# EAGLE board controller_io (EAGLE 6.5.0), part 1 of 5
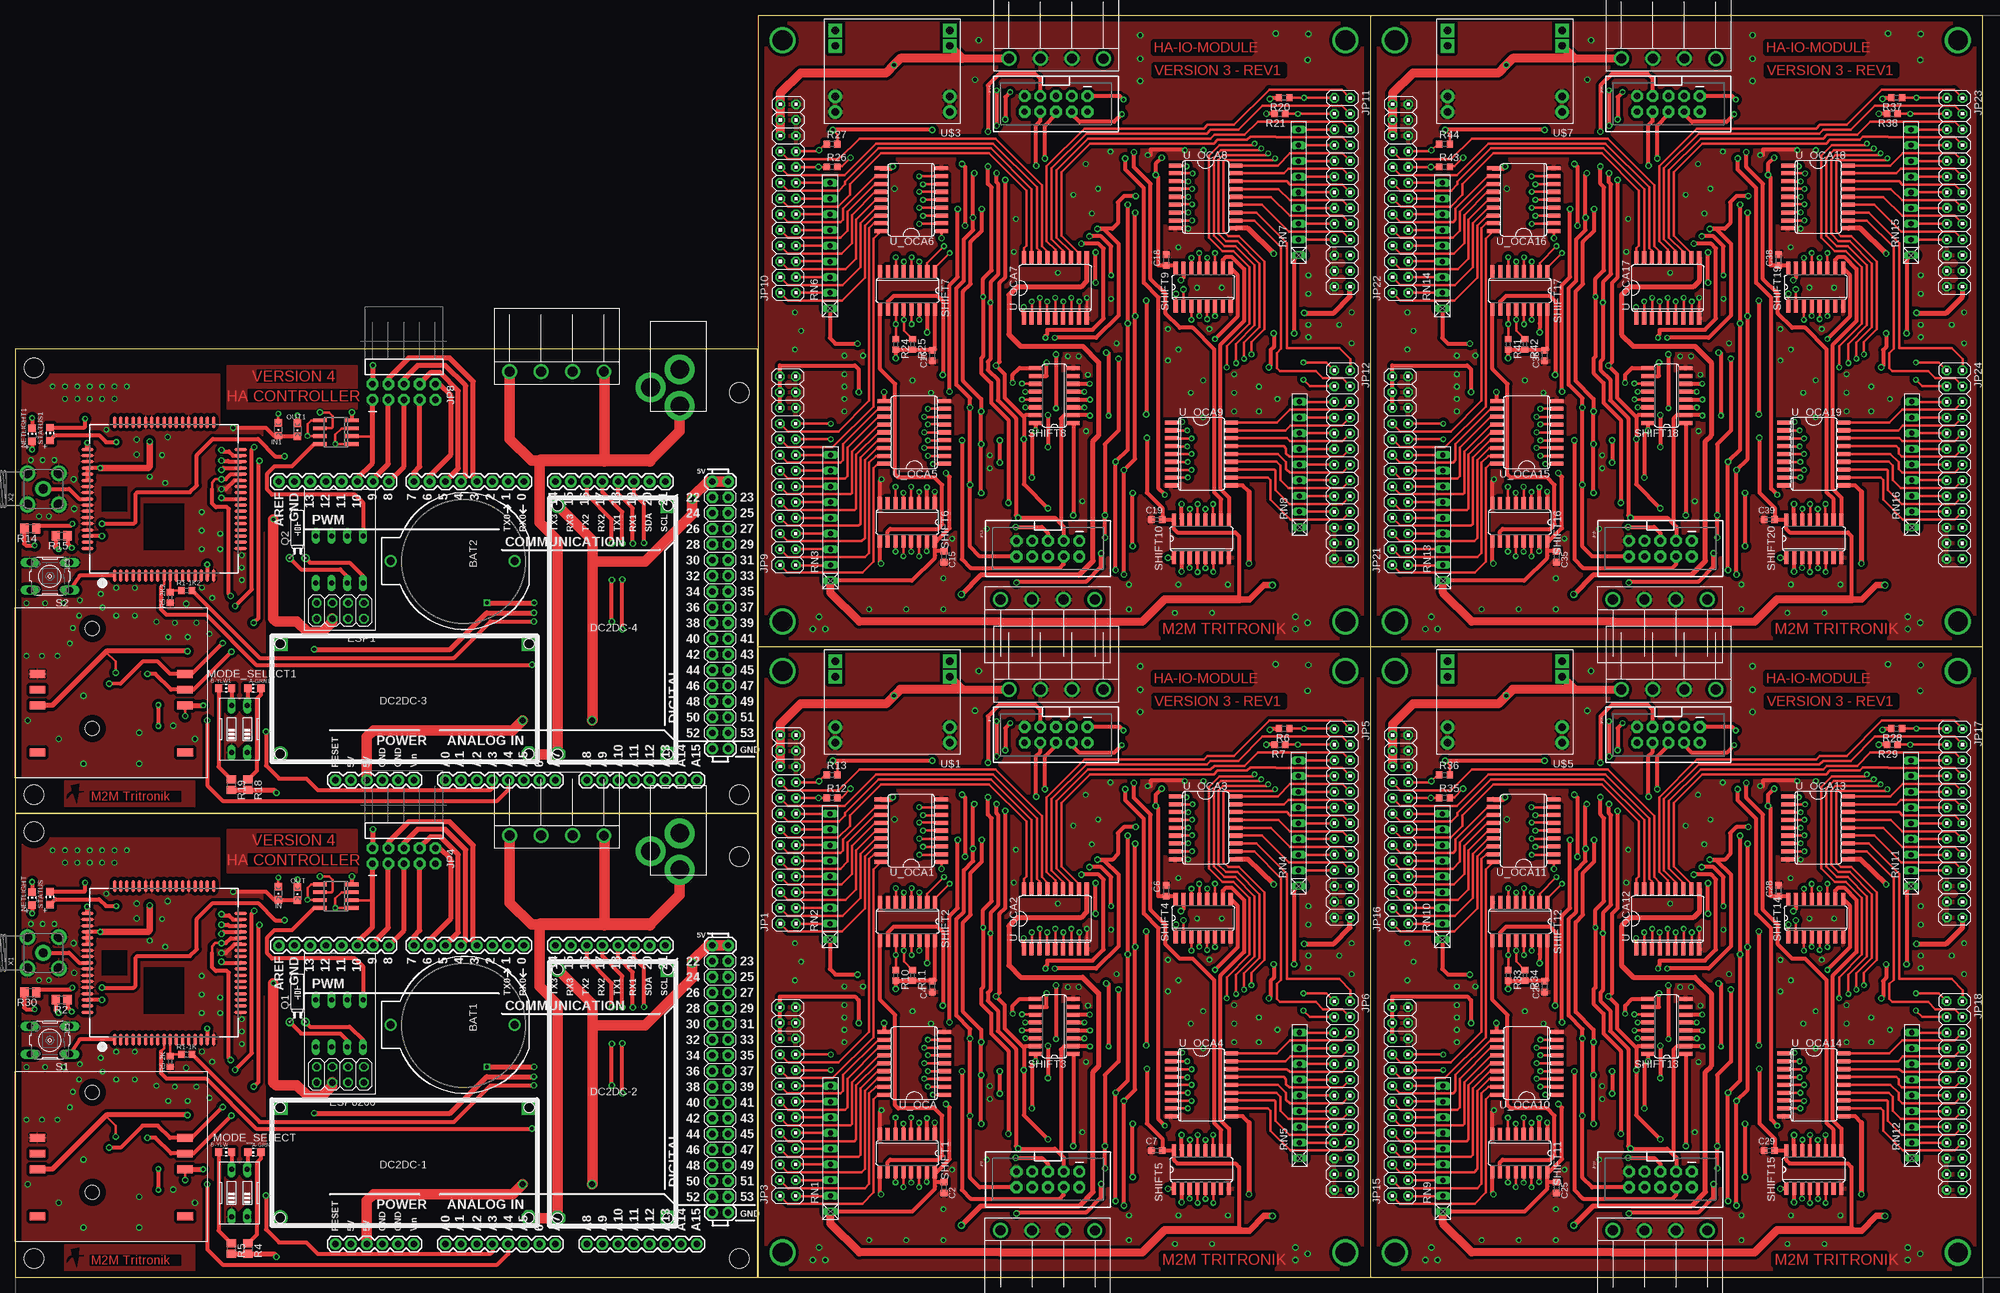
[diagram p0: board, top side]
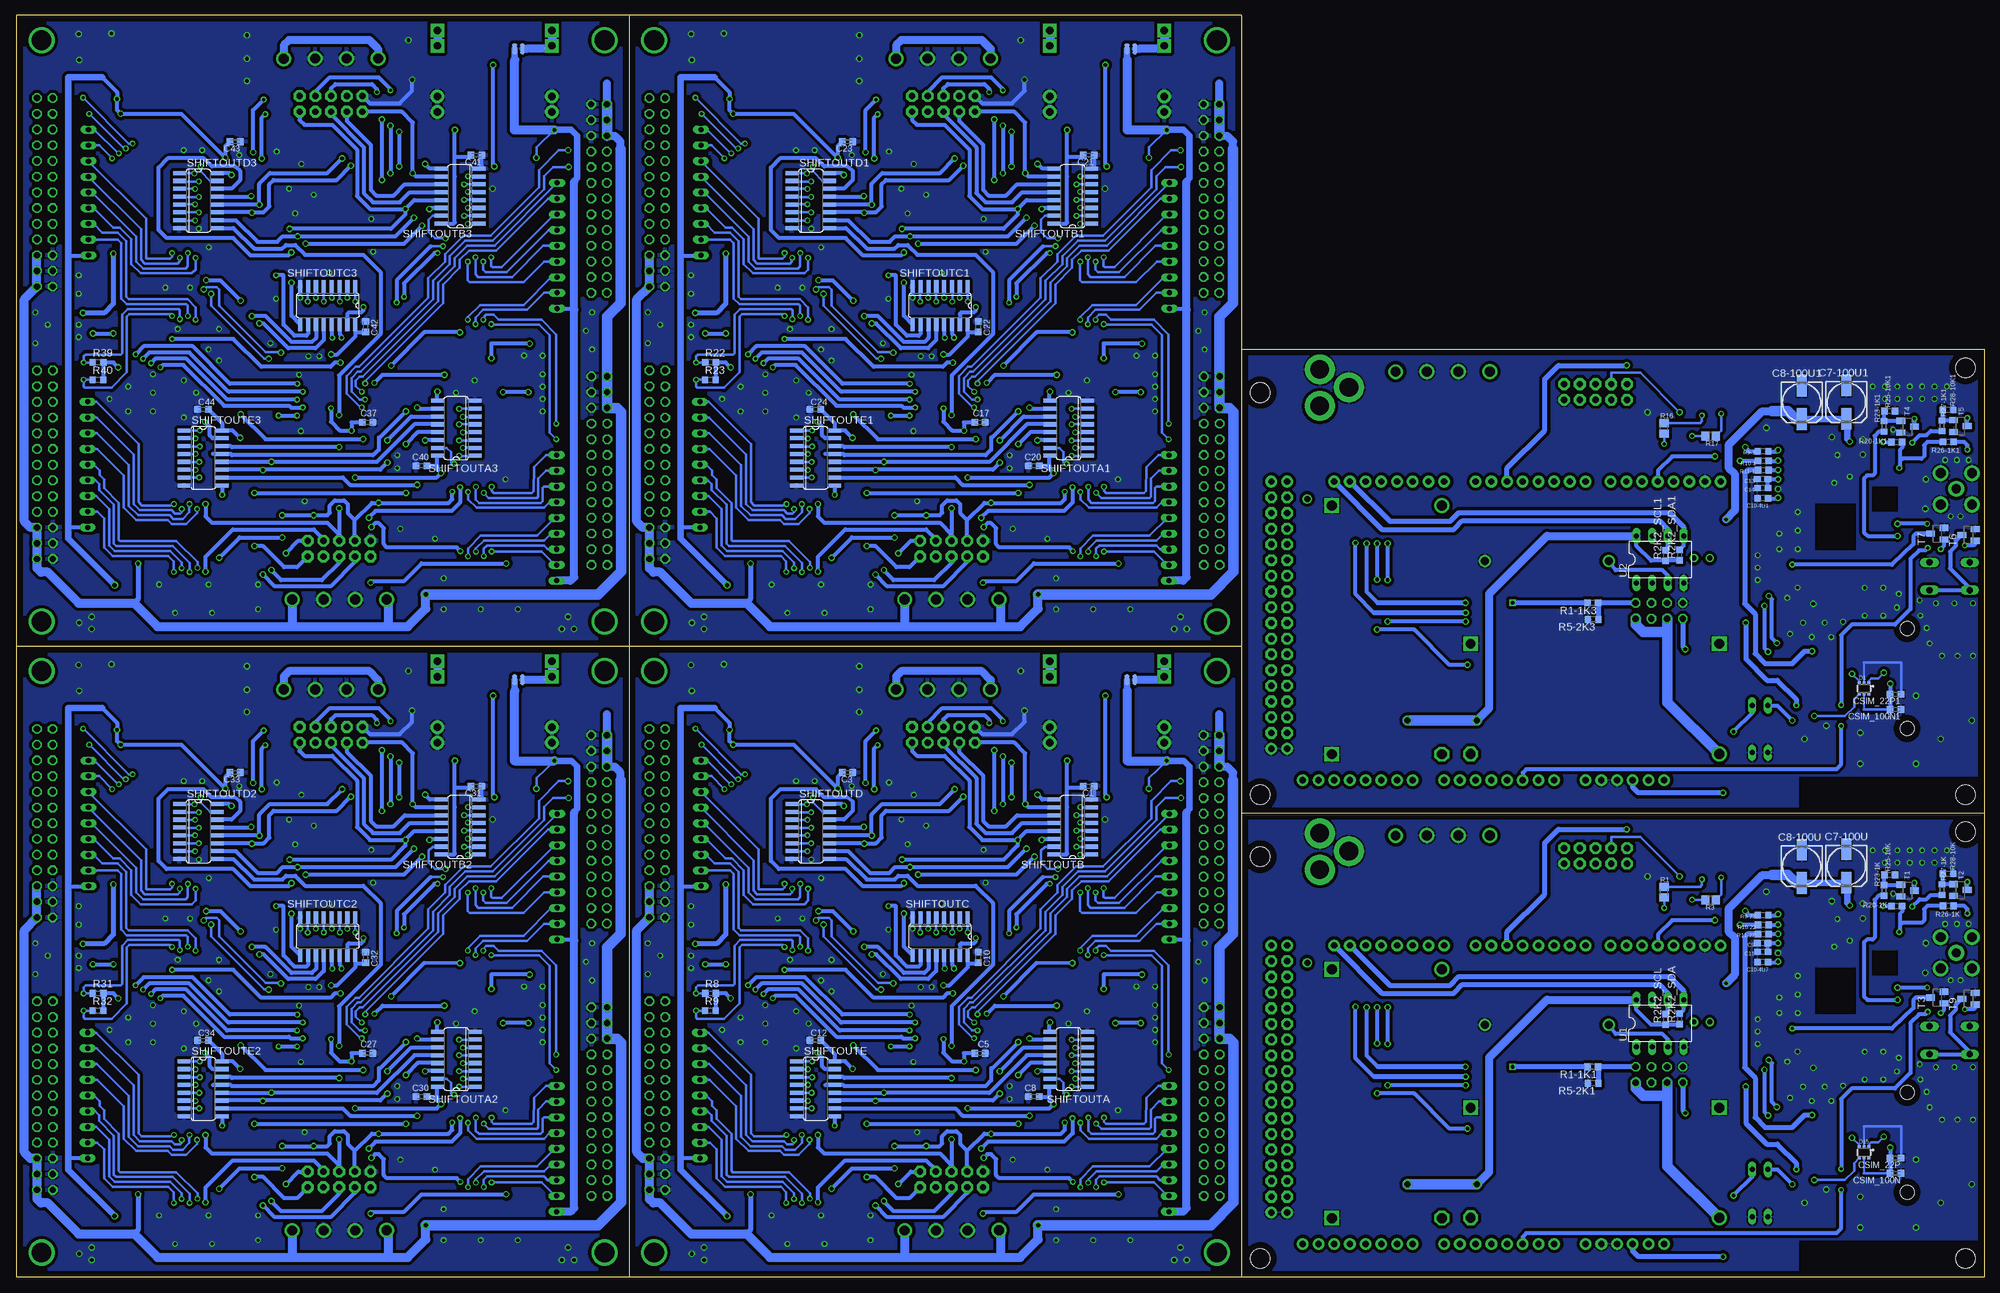
[diagram p1: board, bottom side, seen from below]

Size 318.01 x 204 mm. Coordinates in mm from the lower left corner, seen from the top.
Outline: 0,75.02 119.98,75.03 120,0.02 0,0.02 0,75.02
Outline: 219.01,0 120.01,0 120.01,102
Outline: 0,75.02 120,75.02 119.98,150.03 0,150.02 0,75.02
Outline: 219.01,204 120.01,204 120.01,102
Outline: 120.01,102 219.01,102
Outline: 318.01,102 318.01,0 219.01,0
Outline: 219.01,102 219.01,0
Outline: 318.01,102 318.01,204 219.01,204
Outline: 219.01,102 318.01,102
Outline: 219.01,204 219.01,102
Copper layers (1*16): Top 0.035mm / dielectric 1.5mm / Bottom 0.035mm
Design rules "default": minimum track width 10mil, minimum drill 24mil, track to track 8mil, track to pad 8mil, pad to pad 8mil, via to via 8mil, smd to smd 8mil, copper to edge 40mil, drill to drill 8mil, minimum pad ring 10mil, minimum via ring 8mil, stop-mask expansion 4mil, vias tented up to drill 0mil, thermal gap 10mil
Net classes: 1 power: width 0.305 mm, drill 0.6 mm, clearance 0.813 mm; 2 GND: width 0.305 mm, drill 0.6 mm, clearance 0.508 mm; 3 LIVEAC: width 0.508 mm, drill 0.508 mm, clearance 1.27 mm
Holes 3.2 mm at 3,3.02 3,72.02 117,68.02 117,3.02 3,78.02 3,147.02 117,143.02 117,78.02

## Footprints (pad centres in the part's own frame; a part is rotated, then mirrored left to right if it is on the bottom)
4-PIN-CON-1759017 = drill 1.6: 1 -7.62,4.13; 2 -2.55,4.1; 3 2.55,4.1; 4 7.63,4.1
CHIP-LED0805 = smd 1.2 x 1.2: A 0,-1.05; C 0,1.05
ARDUINO_MEGA = drill 1.016 pad 1.88: 0 8.89,24.13; 1 6.35,24.13; 2 3.81,24.13; 3 1.27,24.13; 3.3V -19.05,-24.13; 4 -1.27,24.13; 5 -3.81,24.13; 5V@0 -16.51,-24.13; 5V@1 39.37,24.13; 5V@2 41.91,24.13; 6 -6.35,24.13; 7 -8.89,24.13; 8 -12.954,24.13; 9 -15.494,24.13; 10 -18.034,24.13; 11 -20.574,24.13; 12 -23.114,24.13; 13 -25.654,24.13; 14 13.97,24.13; 15 16.51,24.13; 16 19.05,24.13; 17 21.59,24.13; 18 24.13,24.13; 19 26.67,24.13; 20 29.21,24.13; 21 31.75,24.13; A0 -3.81,-24.13; A1 -1.27,-24.13; A2 1.27,-24.13; A3 3.81,-24.13; A4 6.35,-24.13; A5 8.89,-24.13; A6 11.43,-24.13; A7 13.97,-24.13; A8 19.05,-24.13; A9 21.59,-24.13; A10 24.13,-24.13; A11 26.67,-24.13; A12 29.21,-24.13; A13 31.75,-24.13; A14 34.29,-24.13; A15 36.83,-24.13; AREF -30.734,24.13; GND@0 -13.97,-24.13; GND@1 -11.43,-24.13; GND@2 39.37,-19.05; GND@3 41.91,-19.05; GND@4 -28.194,24.13; RESET -21.59,-24.13; VIN -8.89,-24.13 | drill 1.016 pad 1.88 octagon: 22 39.37,21.59; 23 41.91,21.59; 24 39.37,19.05; 25 41.91,19.05; 26 39.37,16.51; 27 41.91,16.51; 28 39.37,13.97; 29 41.91,13.97; 30 39.37,11.43; 31 41.91,11.43; 32 39.37,8.89; 33 41.91,8.89; 34 39.37,6.35; 35 41.91,6.35; 36 39.37,3.81; 37 41.91,3.81; 38 39.37,1.27; 39 41.91,1.27; 40 39.37,-1.27; 41 41.91,-1.27; 42 39.37,-3.81; 43 41.91,-3.81; 44 39.37,-6.35; 45 41.91,-6.35; 46 39.37,-8.89; 47 41.91,-8.89; 48 39.37,-11.43; 49 41.91,-11.43; 50 39.37,-13.97; 51 41.91,-13.97; 52 39.37,-16.51; 53 41.91,-16.51
BATTCOM_20MM_PTH = drill 1.3: 1 11.85,0; 2 -8.15,0
C0603K = smd 1.05 x 1.08: 1 -0.875,0; 2 0.875,0
153CLV-0605 = smd 3.5 x 1.6: + 2.7,0; - -2.7,0
C0603 = smd 1.1 x 1: 1 -0.85,0; 2 0.85,0
SOT363 = smd 0.5 x 0.5: 1 -0.75,-0.9; 3 0.75,-0.9; 4 0.75,0.9; 6 -0.75,0.9 | smd 0.4 x 0.5: 2 0,-0.9; 5 0,0.9
DCDCMODULE = drill 1.6 square: GND#0 -20.08,-8.82; GND#1 20.12,-8.82 | drill 1.6 octagon: VIN -20.08,8.98 | drill 1.6: VOUT 20.12,8.98
PJ-102A = drill 3 pad 4.8: RING 0.1,-3.39; RING_SW -4.6,-6.29; TIP 0.1,-9.29
ESP8266 = drill 1.016 octagon: CHPD 1.27,1.27; GND 3.81,-1.27; IO0 -1.27,-1.27; IO2 1.27,-1.27; RST -1.27,1.27; RXD -3.81,-1.27; TXD 3.81,1.27; VCC -3.81,1.27
SIM900_SMT = smd 2 x 0.6: P$1 -12.4,8; P$2 -12.4,7; P$3 -12.4,6; P$4 -12.4,5; P$5 -12.4,4; P$6 -12.4,3; P$7 -12.4,2; P$8 -12.4,1; P$9 -12.4,0; P$10 -12.4,-1; P$11 -12.4,-2; P$12 -12.4,-3; P$13 -12.4,-4; P$14 -12.4,-5; P$15 -12.4,-6; P$16 -12.4,-7; P$17 -12.4,-8; P$35 12.4,-8; P$36 12.4,-7; P$37 12.4,-6; P$38 12.4,-5; P$39 12.4,-4; P$40 12.4,-3; P$41 12.4,-2; P$42 12.4,-1; P$43 12.4,0; P$44 12.4,1; P$45 12.4,2; P$46 12.4,3; P$47 12.4,4; P$48 12.4,5; P$49 12.4,6; P$50 12.4,7; P$51 12.4,8 | smd 0.6 x 2: P$18 -8,-12.4; P$19 -7,-12.4; P$20 -6,-12.4; P$21 -5,-12.4; P$22 -4,-12.4; P$23 -3,-12.4; P$24 -2,-12.4; P$25 -1,-12.4; P$26 0,-12.4; P$27 1,-12.4; P$28 2,-12.4; P$29 3,-12.4; P$30 4,-12.4; P$31 5,-12.4; P$32 6,-12.4; P$33 7,-12.4; P$34 8,-12.4; P$52 8,12.4; P$53 7,12.4; P$54 6,12.4; P$55 5,12.4; P$56 4,12.4; P$57 3,12.4; P$58 2,12.4; P$59 1,12.4; P$60 0,12.4; P$61 -1,12.4; P$62 -2,12.4; P$63 -3,12.4; P$64 -4,12.4; P$65 -5,12.4; P$66 -6,12.4; P$67 -7,12.4; P$68 -8,12.4
SO08 = smd 0.6 x 2.2: 1 -1.905,-2.6; 2 -0.635,-2.6; 3 0.635,-2.6; 4 1.905,-2.6; 5 1.905,2.6; 6 0.635,2.6; 7 -0.635,2.6; 8 -1.905,2.6
CHIPLED_0805 = smd 1.2 x 1.2: A 0,-1.05; C 0,1.05
2X13 = drill 1.016 octagon: 1 -15.24,-1.27; 2 -15.24,1.27; 3 -12.7,-1.27; 4 -12.7,1.27; 5 -10.16,-1.27; 6 -10.16,1.27; 7 -7.62,-1.27; 8 -7.62,1.27; 9 -5.08,-1.27; 10 -5.08,1.27; 11 -2.54,-1.27; 12 -2.54,1.27; 13 0,-1.27; 14 0,1.27; 15 2.54,-1.27; 16 2.54,1.27; 17 5.08,-1.27; 18 5.08,1.27; 19 7.62,-1.27; 20 7.62,1.27; 21 10.16,-1.27; 22 10.16,1.27; 23 12.7,-1.27; 24 12.7,1.27; 25 15.24,-1.27; 26 15.24,1.27
2X5-SHROUDED = drill 1.016 pad 1.88 octagon: 1 -1.27,5.08; 2 1.27,5.08; 3 -1.27,2.54; 4 1.27,2.54; 5 -1.27,0; 6 1.27,0; 7 -1.27,-2.54; 8 1.27,-2.54; 9 -1.27,-5.08; 10 1.27,-5.08
2X5-RA = drill 1.016 pad 1.88 octagon: 1 -1.27,5.08; 2 1.27,5.08; 3 -1.27,2.54; 4 1.27,2.54; 5 -1.27,0; 6 1.27,0; 7 -1.27,-2.54; 8 1.27,-2.54; 9 -1.27,-5.08; 10 1.27,-5.08
EDG-02 = drill 0.813 long: 1 -1.27,-3.81; 2 1.27,-3.81; 3 1.27,3.81; 4 -1.27,3.81
TC26H = drill 0.813: 1 -1.27,0; 2 1.27,0
R0805 = smd 1.3 x 1.5: 1 -0.85,0; 2 0.85,0
R0603 = smd 1 x 1.1: 1 -0.85,0; 2 0.85,0
M0805 = smd 1.3 x 1.6: 1 -0.95,0; 2 0.95,0
RN-9 = drill 0.813 long: 1 -10.16,0; 2 -7.62,0; 3 -5.08,0; 4 -2.54,0; 5 0,0; 6 2.54,0; 7 5.08,0; 8 7.62,0; 9 10.16,0
B3F-10XX = drill 1.016 long: 1 -3.251,2.261; 2 3.251,2.261; 3 -3.251,-2.261; 4 3.251,-2.261
SO16 = smd 0.66 x 2.032: 1 -4.445,-3.073; 2 -3.175,-3.073; 3 -1.905,-3.073; 4 -0.635,-3.073; 5 0.635,-3.073; 6 1.905,-3.073; 7 3.175,-3.073; 8 4.445,-3.073; 9 4.445,3.073; 10 3.175,3.073; 11 1.905,3.073; 12 0.635,3.073; 13 -0.635,3.073; 14 -1.905,3.073; 15 -3.175,3.073; 16 -4.445,3.073
SIM_HOLDER_PUSH = smd 2.54 x 1.27: 4 12.066,-9.814; 8 -11.804,-9.814; CLK 12.046,-2.214; GND -11.824,2.866; I/O -11.824,-2.214; RST 12.046,0.326; VCC 12.046,2.866; VPP -11.824,0.326 | hole 2.3: -2.924,10.216; -2.934,-5.934
SOT23-BEC = smd 1 x 1.4: B -0.95,-1.1; C 0,1.1; E 0.95,-1.1
DIL08 = drill 0.813 long: 1 -3.81,-3.81; 2 -1.27,-3.81; 3 1.27,-3.81; 4 3.81,-3.81; 5 3.81,3.81; 6 1.27,3.81; 7 -1.27,3.81; 8 -3.81,3.81
DCDCMODULE-SMALL = drill 1.2 pad 2.184: INM#1 1.8,15; INM#2 1.8,12.5; OUTM#1 20.3,15; OUTM#2 20.3,12.5 | drill 1.2 pad 2.184 square: INP#1 1.8,4.3; INP#2 1.8,1.8; OUTP#1 20.3,4.3; OUTP#2 20.3,1.8
DOUBLE_SMALL_PAD = smd 0.813 x 1.676: PAD1 -0.635,0; PAD2 0.635,0
SO18L = smd 0.66 x 2.032: 1 -5.08,-4.902; 2 -3.81,-4.902; 3 -2.54,-4.902; 4 -1.27,-4.902; 5 0,-4.902; 6 1.27,-4.902; 7 2.54,-4.902; 8 3.81,-4.902; 9 5.08,-4.902; 10 5.08,4.902; 11 3.81,4.902; 12 2.54,4.902; 13 1.27,4.902; 14 0,4.902; 15 -1.27,4.902; 16 -2.54,4.902; 17 -3.81,4.902; 18 -5.08,4.902
SMA90_DIP = drill 1.5 pad 2.54: ANTENNA 0,0 | drill 1.6 pad 2.54: GND1 -2.54,2.54; GND2 2.54,2.54; GND3 -2.54,-2.54; GND4 2.54,-2.54

## Placement (x,y rotation side)
4-WAY_L-TERMINAL  4-PIN-CON-1759017  [4-PIN-CON-1759017]  87.5,75.52 180 top
4-WAY_L-TERMINAL1  4-PIN-CON-1759017  [4-PIN-CON-1759017]  87.5,150.52 180 top
A-GRN  green  [CHIP-LED0805]  38.6,20.22 90 top
A-GRN1  green  [CHIP-LED0805]  38.6,95.22 90 top
ARDUINO_FOOTPRINT  ARDUINO-MEGAFULL  [ARDUINO_MEGA]  73.3,29.51 0 top
ARDUINO_FOOTPRINT1  ARDUINO-MEGAFULL  [ARDUINO_MEGA]  73.3,104.51 0 top
B-YLW  yellow  [CHIP-LED0805]  33.9,20.22 270 top
B-YLW1  yellow  [CHIP-LED0805]  33.9,95.22 270 top
BAT1  [BATTCOM_20MM_PTH]  72.52,40.8 180 top
BAT2  [BATTCOM_20MM_PTH]  72.52,115.8 180 top
C1  100nF  [C0603K]  144.71,79.4 180 bottom
C2  100nF  [C0603K]  150.11,14.5 90 top
C3  100nF  [C0603K]  183.71,81.6 180 bottom
C4  100nF  [C0603K]  148.21,47 90 top
C5  100nF  [C0603K]  162.31,36.2 180 bottom
C6  100nF  [C0603K]  186.01,62.5 270 top
C7  100nF  [C0603K]  184.51,20.5 0 top
C7-100U  100uF  [153CLV-0605]  22.26,66.49 270 bottom
C7-100U1  100uF  [153CLV-0605]  22.26,141.49 270 bottom
C8  100nF  [C0603K]  153.61,29.2 0 bottom
C8-100U  100uF  [153CLV-0605]  29.48,66.45 270 bottom
C8-100U1  100uF  [153CLV-0605]  29.48,141.45 270 bottom
C9  100nF  [C0603]  35.78,54.03 180 bottom
C10  100nF  [C0603K]  162.61,51.7 270 bottom
C10-4U1  4.7nF  [C0603]  35.77,125.93 180 bottom
C10-4U7  4.7nF  [C0603]  35.77,50.93 180 bottom
C11  22pF  [C0603]  35.77,52.61 180 bottom
C12  100nF  [C0603K]  188.91,38.3 0 bottom
C13  100nF  [C0603]  35.78,129.03 180 bottom
C14  22pF  [C0603]  35.77,127.61 180 bottom
C15  100nF  [C0603K]  150.11,116.5 90 top
C16  100nF  [C0603K]  148.21,149 90 top
C17  100nF  [C0603K]  162.31,138.2 180 bottom
C18  100nF  [C0603K]  186.01,164.5 270 top
C19  100nF  [C0603K]  184.51,122.5 0 top
C20  100nF  [C0603K]  153.61,131.2 0 bottom
C21  100nF  [C0603K]  144.71,181.4 180 bottom
C22  100nF  [C0603K]  162.61,153.7 270 bottom
C23  100nF  [C0603K]  183.71,183.6 180 bottom
C24  100nF  [C0603K]  188.91,140.3 0 bottom
C25  100nF  [C0603K]  249.11,14.5 90 top
C26  100nF  [C0603K]  247.21,47 90 top
C27  100nF  [C0603K]  261.31,36.2 180 bottom
C28  100nF  [C0603K]  285.01,62.5 270 top
C29  100nF  [C0603K]  283.51,20.5 0 top
C30  100nF  [C0603K]  252.61,29.2 0 bottom
C31  100nF  [C0603K]  243.71,79.4 180 bottom
C32  100nF  [C0603K]  261.61,51.7 270 bottom
C33  100nF  [C0603K]  282.71,81.6 180 bottom
C34  100nF  [C0603K]  287.91,38.3 0 bottom
C35  100nF  [C0603K]  249.11,116.5 90 top
C36  100nF  [C0603K]  247.21,149 90 top
C37  100nF  [C0603K]  261.31,138.2 180 bottom
C38  100nF  [C0603K]  285.01,164.5 270 top
C39  100nF  [C0603K]  283.51,122.5 0 top
C40  100nF  [C0603K]  252.61,131.2 0 bottom
C41  100nF  [C0603K]  243.71,181.4 180 bottom
C42  100nF  [C0603K]  261.61,153.7 270 bottom
C43  100nF  [C0603K]  282.71,183.6 180 bottom
C44  100nF  [C0603K]  287.91,140.3 0 bottom
CSIM_22P  22pF  [C0603K]  14.29,19.28 180 bottom
CSIM_22P1  22pF  [C0603K]  14.29,94.28 180 bottom
CSIM_100N  100nF  [C0603K]  14.3,16.8 180 bottom
CSIM_100N1  100nF  [C0603K]  14.3,91.8 180 bottom
D1  [SOT363]  19.41,95.19 180 bottom
D15  [SOT363]  19.41,20.19 180 bottom
DC2DC-1  DCDCMODULE  [DCDCMODULE]  62.92,18.6 180 top
DC2DC-2  DCDCMODULE  [DCDCMODULE]  96.63,29.64 90 top
DC2DC-3  DCDCMODULE  [DCDCMODULE]  62.92,93.6 180 top
DC2DC-4  DCDCMODULE  [DCDCMODULE]  96.63,104.64 90 top
DC_JACKTHM  2.1MMJACKTHM  [PJ-102A]  107.27,75.15 0 top
DC_JACKTHM1  2.1MMJACKTHM  [PJ-102A]  107.27,150.15 0 top
ESP1  ESP8266  [ESP8266]  52.5,107.75 180 top
ESP8266  ESP8266  [ESP8266]  52.5,32.75 180 top
IC1  [SIM900_SMT]  24.02,50.84 90 top
IC2  LM358MX  [SO08]  51.8,61.62 90 top
IC3  [SIM900_SMT]  24.02,125.84 90 top
IC4  LM358MX  [SO08]  51.8,136.62 90 top
IN  green  [CHIPLED_0805]  42.5,62.12 180 top
IN1  green  [CHIPLED_0805]  42.5,137.12 180 top
J1  4-PIN-CON-1759017  [4-PIN-CON-1759017]  168.24,99.15 180 top
J2  4-PIN-CON-1759017  [4-PIN-CON-1759017]  166.85,3.45 0 top
J3  4-PIN-CON-1759017  [4-PIN-CON-1759017]  168.24,201.15 180 top
J4  4-PIN-CON-1759017  [4-PIN-CON-1759017]  166.85,105.45 0 top
J5  4-PIN-CON-1759017  [4-PIN-CON-1759017]  267.24,99.15 180 top
J6  4-PIN-CON-1759017  [4-PIN-CON-1759017]  265.85,3.45 0 top
J7  4-PIN-CON-1759017  [4-PIN-CON-1759017]  267.24,201.15 180 top
J8  4-PIN-CON-1759017  [4-PIN-CON-1759017]  265.85,105.45 0 top
JP1  [2X13]  124.9,72.4 90 top
JP2  [2X5-SHROUDED]  166.91,15.8 270 top
JP3  [2X13]  124.85,28.4 90 top
JP4  [2X5-RA]  62.8,68.12 90 top
JP5  [2X13]  214.49,73.4 270 top
JP6  [2X13]  214.47,29.37 270 top
JP7  [2X5-SHROUDED]  168.21,87.7 270 top
JP8  [2X5-RA]  62.8,143.12 90 top
JP9  [2X13]  124.85,130.4 90 top
JP10  [2X13]  124.9,174.4 90 top
JP11  [2X13]  214.49,175.4 270 top
JP12  [2X13]  214.47,131.37 270 top
JP13  [2X5-SHROUDED]  166.91,117.8 270 top
JP14  [2X5-SHROUDED]  168.21,189.7 270 top
JP15  [2X13]  223.85,28.4 90 top
JP16  [2X13]  223.9,72.4 90 top
JP17  [2X13]  313.49,73.4 270 top
JP18  [2X13]  313.47,29.37 270 top
JP19  [2X5-SHROUDED]  265.91,15.8 270 top
JP20  [2X5-SHROUDED]  267.21,87.7 270 top
JP21  [2X13]  223.85,130.4 90 top
JP22  [2X13]  223.9,174.4 90 top
JP23  [2X13]  313.49,175.4 270 top
JP24  [2X13]  313.47,131.37 270 top
JP25  [2X5-SHROUDED]  265.91,117.8 270 top
JP26  [2X5-SHROUDED]  267.21,189.7 270 top
MODE_SELECT  [EDG-02]  36.2,13.62 0 top
MODE_SELECT1  [EDG-02]  36.2,88.62 0 top
NETLIGHT  green  [CHIP-LED0805]  2.7,61.22 0 top
NETLIGHT1  green  [CHIP-LED0805]  2.7,136.22 0 top
OUT  green  [CHIPLED_0805]  45.6,62.02 180 top
OUT1  green  [CHIPLED_0805]  45.6,137.02 180 top
Q1  [TC26H]  45.61,41.26 0 top
Q2  [TC26H]  45.61,116.26 0 top
R1  220  [R0805]  51.72,62.26 90 bottom
R1-1K  1K  [R0603]  27.69,36.02 0 top
R1-1K1  1K  [R0603]  63.25,34.03 180 bottom
R1-1K2  1K  [R0603]  27.69,111.02 0 top
R1-1K3  1K  [R0603]  63.25,109.03 180 bottom
R2  120  [M0805]  7.46,44.88 180 top
R2K2_SCL  2.2K  [R0603]  51.49,41.69 90 bottom
R2K2_SCL1  2.2K  [R0603]  51.49,116.69 90 bottom
R2K2_SDA  2.2K  [R0603]  49.21,41.76 90 bottom
R2K2_SDA1  2.2K  [R0603]  49.21,116.76 90 bottom
R3  220  [R0805]  44.22,60.99 0 bottom
R4  1K  [R0805]  37.6,4.62 270 top
R5  1K  [R0805]  34.9,4.62 270 top
R5-2K  2K  [R0603]  25.01,34.89 90 top
R5-2K1  2K  [R0603]  63.2,31.36 0 bottom
R5-2K2  2K  [R0603]  25.01,109.89 90 top
R5-2K3  2K  [R0603]  63.2,106.36 0 bottom
R6  10K  [R0603]  205.11,88.7 180 top
R7  10K  [R0603]  204.41,86.1 180 top
R8  10K  [R0603]  205.87,45.9 0 bottom
R9  10K  [R0603]  205.91,43.1 0 bottom
R9-1  22  [R0603]  35.71,133.53 180 bottom
R9-22  22  [R0603]  35.71,58.53 180 bottom
R10  10K  [R0603]  142.31,48.8 270 top
R10-1  22  [R0603]  35.67,131.98 180 bottom
R10-22  22  [R0603]  35.67,56.98 180 bottom
R11  10K  [R0603]  145.01,48.8 270 top
R11-1  22  [R0603]  35.68,130.48 180 bottom
R11-22  22  [R0603]  35.68,55.48 180 bottom
R12  10K  [R0603]  132.01,77.5 0 top
R13  10K  [R0603]  132.01,81.2 0 top
R14  120  [M0805]  2.41,121.07 180 top
R15  120  [M0805]  7.46,119.88 180 top
R16  220  [R0805]  51.72,137.26 90 bottom
R17  220  [R0805]  44.22,135.99 0 bottom
R18  1K  [R0805]  37.6,79.62 270 top
R19  1K  [R0805]  34.9,79.62 270 top
R20  10K  [R0603]  205.11,190.7 180 top
R20-1K  1K  [R0603]  14.1,60.01 0 bottom
R20-1K1  1K  [R0603]  14.1,135.01 0 bottom
R21  10K  [R0603]  204.41,188.1 180 top
R22  10K  [R0603]  205.87,147.9 0 bottom
R23  10K  [R0603]  205.91,145.1 0 bottom
R23-1K  1K  [R0603]  16.18,62.55 270 bottom
R23-1K1  1K  [R0603]  16.18,137.55 270 bottom
R24  10K  [R0603]  142.31,150.8 270 top
R25  10K  [R0603]  145.01,150.8 270 top
R25-10K  10K  [R0603]  15.23,65.04 0 bottom
R25-10K1  10K  [R0603]  15.23,140.04 0 bottom
R26  10K  [R0603]  132.01,179.5 0 top
R26-1K  1K  [R0603]  5.77,60.05 180 bottom
R26-1K1  1K  [R0603]  5.77,135.05 180 bottom
R27  10K  [R0603]  132.01,183.2 0 top
R27-1K  1K  [R0603]  6.8,62.66 270 bottom
R27-1K1  1K  [R0603]  6.8,137.66 270 bottom
R28  10K  [R0603]  304.11,88.7 180 top
R28-10K  10K  [R0603]  5.84,65.24 0 bottom
R28-10K1  10K  [R0603]  5.84,140.24 0 bottom
R29  10K  [R0603]  303.41,86.1 180 top
R30  120  [M0805]  2.41,46.07 180 top
R31  10K  [R0603]  304.87,45.9 0 bottom
R32  10K  [R0603]  304.91,43.1 0 bottom
R33  10K  [R0603]  241.31,48.8 270 top
R34  10K  [R0603]  244.01,48.8 270 top
R35  10K  [R0603]  231.01,77.5 0 top
R36  10K  [R0603]  231.01,81.2 0 top
R37  10K  [R0603]  304.11,190.7 180 top
R38  10K  [R0603]  303.41,188.1 180 top
R39  10K  [R0603]  304.87,147.9 0 bottom
R40  10K  [R0603]  304.91,145.1 0 bottom
R41  10K  [R0603]  241.31,150.8 270 top
R42  10K  [R0603]  244.01,150.8 270 top
R43  10K  [R0603]  231.01,179.5 0 top
R44  10K  [R0603]  231.01,183.2 0 top
RN1  10K  [RN-9]  131.76,20.77 90 top
RN2  10K  [RN-9]  131.67,64.77 90 top
RN3  10K  [RN-9]  131.76,122.77 90 top
RN4  10K  [RN-9]  207.43,73.39 90 top
RN5  10K  [RN-9]  207.58,29.39 90 top
RN6  10K  [RN-9]  131.67,166.77 90 top
RN7  10K  [RN-9]  207.43,175.39 90 top
RN8  10K  [RN-9]  207.58,131.39 90 top
RN9  10K  [RN-9]  230.76,20.77 90 top
RN10  10K  [RN-9]  230.67,64.77 90 top
RN11  10K  [RN-9]  306.43,73.39 90 top
RN12  10K  [RN-9]  306.58,29.39 90 top
RN13  10K  [RN-9]  230.76,122.77 90 top
RN14  10K  [RN-9]  230.67,166.77 90 top
RN15  10K  [RN-9]  306.43,175.39 90 top
RN16  10K  [RN-9]  306.58,131.39 90 top
S1  [B3F-10XX]  5.56,38.33 180 top
S2  [B3F-10XX]  5.56,113.33 180 top
SHIFT1  74HC165D  [SO16]  144.17,20.06 180 top
SHIFT2  74HC165D  [SO16]  144.22,57.53 180 top
SHIFT3  74HC165D  [SO16]  167.95,40.54 90 top
SHIFT4  74HC165D  [SO16]  192.01,58.08 0 top
SHIFT5  74HC165D  [SO16]  191.73,17.41 0 top
SHIFT6  74HC165D  [SO16]  144.17,122.06 180 top
SHIFT7  74HC165D  [SO16]  144.22,159.53 180 top
SHIFT8  74HC165D  [SO16]  167.95,142.54 90 top
SHIFT9  74HC165D  [SO16]  192.01,160.08 0 top
SHIFT10  74HC165D  [SO16]  191.73,119.41 0 top
SHIFT11  74HC165D  [SO16]  243.17,20.06 180 top
SHIFT12  74HC165D  [SO16]  243.22,57.53 180 top
SHIFT13  74HC165D  [SO16]  266.95,40.54 90 top
SHIFT14  74HC165D  [SO16]  291.01,58.08 0 top
SHIFT15  74HC165D  [SO16]  290.73,17.41 0 top
SHIFT16  74HC165D  [SO16]  243.17,122.06 180 top
SHIFT17  74HC165D  [SO16]  243.22,159.53 180 top
SHIFT18  74HC165D  [SO16]  266.95,142.54 90 top
SHIFT19  74HC165D  [SO16]  291.01,160.08 0 top
SHIFT20  74HC165D  [SO16]  290.73,119.41 0 top
SHIFTOUTA  74HC595D  [SO16]  147.97,35.26 90 bottom
SHIFTOUTA1  74HC595D  [SO16]  147.97,137.26 90 bottom
SHIFTOUTA2  74HC595D  [SO16]  246.97,35.26 90 bottom
SHIFTOUTA3  74HC595D  [SO16]  246.97,137.26 90 bottom
SHIFTOUTB  74HC595D  [SO16]  147.35,72.79 90 bottom
SHIFTOUTB1  74HC595D  [SO16]  147.35,174.79 90 bottom
SHIFTOUTB2  74HC595D  [SO16]  246.35,72.79 90 bottom
SHIFTOUTB3  74HC595D  [SO16]  246.35,174.79 90 bottom
SHIFTOUTC  74HC595D  [SO16]  168.75,55.09 180 bottom
SHIFTOUTC1  74HC595D  [SO16]  168.75,157.09 180 bottom
SHIFTOUTC2  74HC595D  [SO16]  267.75,55.09 180 bottom
SHIFTOUTC3  74HC595D  [SO16]  267.75,157.09 180 bottom
SHIFTOUTD  74HC595D  [SO16]  189.66,72.07 270 bottom
SHIFTOUTD1  74HC595D  [SO16]  189.66,174.07 270 bottom
SHIFTOUTD2  74HC595D  [SO16]  288.66,72.07 270 bottom
SHIFTOUTD3  74HC595D  [SO16]  288.66,174.07 270 bottom
SHIFTOUTE  74HC595D  [SO16]  188.89,30.47 270 bottom
SHIFTOUTE1  74HC595D  [SO16]  188.89,132.47 270 bottom
SHIFTOUTE2  74HC595D  [SO16]  287.89,30.47 270 bottom
SHIFTOUTE3  74HC595D  [SO16]  287.89,132.47 270 bottom
SIM_HOLDER  SIM_HOLDER_PUSH  [SIM_HOLDER_PUSH]  15.37,19.67 0 top
SIM_HOLDER1  SIM_HOLDER_PUSH  [SIM_HOLDER_PUSH]  15.37,94.67 0 top
STATUS  yellow  [CHIP-LED0805]  5.6,61.32 0 top
STATUS1  yellow  [CHIP-LED0805]  5.6,136.32 0 top
T1  [SOT23-BEC]  12.36,62.51 270 bottom
T2  [SOT23-BEC]  3.82,62.61 270 bottom
T3  [SOT23-BEC]  7.56,45.22 90 bottom
T4  [SOT23-BEC]  12.36,137.51 270 bottom
T5  [SOT23-BEC]  3.82,137.61 270 bottom
T6  [SOT23-BEC]  2.51,120.02 90 bottom
T7  [SOT23-BEC]  7.56,120.22 90 bottom
T9  [SOT23-BEC]  2.51,45.02 90 bottom
U1  DS1307  [DIL08]  52.37,41.04 0 bottom
U2  DS1307  [DIL08]  52.37,116.04 0 bottom
U$1  DCDCMODULE_SMALL  [DCDCMODULE-SMALL]  152.81,101.4 180 top
U$2  DOUBLE_SMALL_PAD  [DOUBLE_SMALL_PAD]  137.91,96.6 180 bottom
U$3  DCDCMODULE_SMALL  [DCDCMODULE-SMALL]  152.81,203.4 180 top
U$4  DOUBLE_SMALL_PAD  [DOUBLE_SMALL_PAD]  137.91,198.6 180 bottom
U$5  DCDCMODULE_SMALL  [DCDCMODULE-SMALL]  251.81,101.4 180 top
U$6  DOUBLE_SMALL_PAD  [DOUBLE_SMALL_PAD]  236.91,96.6 180 bottom
U$7  DCDCMODULE_SMALL  [DCDCMODULE-SMALL]  251.81,203.4 180 top
U$8  DOUBLE_SMALL_PAD  [DOUBLE_SMALL_PAD]  236.91,198.6 180 bottom
U_OCA  ULN2803  [SO18L]  145.31,34.6 90 top
U_OCA1  ULN2803  [SO18L]  144.81,72.2 90 top
U_OCA2  ULN2803  [SO18L]  168.09,57.95 0 top
U_OCA3  ULN2803  [SO18L]  192.4,72.66 270 top
U_OCA4  ULN2803  [SO18L]  191.73,31.11 270 top
U_OCA5  ULN2803  [SO18L]  145.31,136.6 90 top
U_OCA6  ULN2803  [SO18L]  144.81,174.2 90 top
U_OCA7  ULN2803  [SO18L]  168.09,159.95 0 top
U_OCA8  ULN2803  [SO18L]  192.4,174.66 270 top
U_OCA9  ULN2803  [SO18L]  191.73,133.11 270 top
U_OCA10  ULN2803  [SO18L]  244.31,34.6 90 top
U_OCA11  ULN2803  [SO18L]  243.81,72.2 90 top
U_OCA12  ULN2803  [SO18L]  267.09,57.95 0 top
U_OCA13  ULN2803  [SO18L]  291.4,72.66 270 top
U_OCA14  ULN2803  [SO18L]  290.73,31.11 270 top
U_OCA15  ULN2803  [SO18L]  244.31,136.6 90 top
U_OCA16  ULN2803  [SO18L]  243.81,174.2 90 top
U_OCA17  ULN2803  [SO18L]  267.09,159.95 0 top
U_OCA18  ULN2803  [SO18L]  291.4,174.66 270 top
U_OCA19  ULN2803  [SO18L]  290.73,133.11 270 top
X1  [SMA90_DIP]  4.48,52.45 90 top
X2  [SMA90_DIP]  4.48,127.45 90 top

## Library data of the parts
4-WAY_L-TERMINAL 4-WAY_L-TERMINAL1 J1-J8 SIM_HOLDER SIM_HOLDER1 U$2 U$4 U$6 U$8 = maul
A-GRN A-GRN1 B-YLW B-YLW1 = led
ARDUINO_FOOTPRINT ARDUINO_FOOTPRINT1 = SparkFun-Boards
BAT1 BAT2 = SparkFun-Electromechanical
C1-C7 C7-100U C7-100U1 C8 C8-100U C8-100U1 C9 C10 C10-4U1 C10-4U7 C11-C44 CSIM_22P CSIM_22P1 CSIM_100N CSIM_100N1 R1-1K R1-1K1-R1-1K3 R2K2_SCL R2K2_SCL1 R2K2_SDA R2K2_SDA1 R5-2K R5-2K1-R5-2K3 R9-1 R9-22 R10-1 R10-22 R11-1 R11-22 R20-1K R20-1K1 R23-1K R23-1K1 R25-10K R25-10K1 R26-1K R26-1K1 R27-1K R27-1K1 R28-10K R28-10K1 = rcl
D1 D15 IC1 IC3 X1 X2 = microbuilder
DC2DC-1-DC2DC-4 U$1 U$3 U$5 U$7 = bontor
DC_JACKTHM DC_JACKTHM1 IN IN1 NETLIGHT NETLIGHT1 OUT OUT1 STATUS STATUS1 U1 U2 = adafruit
ESP1 ESP8266 = tigorcustom
IC2 IC4 = linear
JP1 JP3 JP5 JP6 JP9-JP12 JP15-JP18 JP21-JP24 = pinhead
JP2 JP4 JP7 JP8 JP13 JP14 JP19 JP20 JP25 JP26 = SparkFun-Connectors
MODE_SELECT MODE_SELECT1 = special
Q1 Q2 = crystal; OC_FARNELL: unknown; OC_NEWARK: unknown
R1-R44 = resistor
RN1-RN16 = resistor-net; OC_FARNELL: unknown; OC_NEWARK: unknown
S1 S2 = switch-omron; MPN: B3F-1000; OC_FARNELL: 176432; OC_NEWARK: 36M3542
SHIFT1-SHIFT20 SHIFTOUTA SHIFTOUTA1-SHIFTOUTA3 SHIFTOUTB SHIFTOUTB1-SHIFTOUTB3 SHIFTOUTC SHIFTOUTC1-SHIFTOUTC3 SHIFTOUTD SHIFTOUTD1-SHIFTOUTD3 SHIFTOUTE SHIFTOUTE1-SHIFTOUTE3 = 74xx-eu
T1 T2 T4 T5 = transistor
T3 T6 T7 T9 = transistor-neu-to92
U_OCA U_OCA1-U_OCA19 = uln2803

## Nets
1-1: JP3.1 RN1.2 SHIFT1.11
1-2: JP3.3 RN1.3 SHIFT1.12
1-3: JP3.5 RN1.4 SHIFT1.13
1-4: JP3.7 RN1.5 SHIFT1.14
1-5: JP3.9 RN1.6 SHIFT1.3
1-6: JP3.11 RN1.7 SHIFT1.4
1-7: JP3.13 RN1.8 SHIFT1.5
1-8: JP3.15 RN1.9 SHIFT1.6
1-9: JP9.1 RN3.2 SHIFT6.11
1-10: JP9.3 RN3.3 SHIFT6.12
1-11: JP9.5 RN3.4 SHIFT6.13
1-12: JP9.7 RN3.5 SHIFT6.14
1-13: JP9.11 RN3.7 SHIFT6.4
1-14: JP9.13 RN3.8 SHIFT6.5
1-15: JP9.15 RN3.9 SHIFT6.6
1-16: JP9.9 RN3.6 SHIFT6.3
1-17: JP15.1 RN9.2 SHIFT11.11
1-18: JP15.3 RN9.3 SHIFT11.12
1-19: JP15.5 RN9.4 SHIFT11.13
1-20: JP15.7 RN9.5 SHIFT11.14
1-21: JP15.11 RN9.7 SHIFT11.4
1-22: JP15.13 RN9.8 SHIFT11.5
1-23: JP15.15 RN9.9 SHIFT11.6
1-24: JP15.9 RN9.6 SHIFT11.3
1-25: JP21.1 RN13.2 SHIFT16.11
1-26: JP21.3 RN13.3 SHIFT16.12
1-27: JP21.5 RN13.4 SHIFT16.13
1-28: JP21.7 RN13.5 SHIFT16.14
1-29: JP21.11 RN13.7 SHIFT16.4
1-30: JP21.13 RN13.8 SHIFT16.5
1-31: JP21.15 RN13.9 SHIFT16.6
1-32: JP21.9 RN13.6 SHIFT16.3
2-1: JP3.17 R10.1 SHIFT2.11
2-2: JP3.19 R11.1 SHIFT2.12
2-3: JP1.1 RN2.2 SHIFT2.13
2-4: JP1.3 RN2.3 SHIFT2.14
2-5: JP1.5 RN2.4 SHIFT2.3
2-6: JP1.7 RN2.5 SHIFT2.4
2-7: JP1.9 RN2.6 SHIFT2.5
2-8: JP1.11 RN2.7 SHIFT2.6
2-9: JP9.17 R24.1 SHIFT7.11
2-10: JP9.19 R25.1 SHIFT7.12
2-11: JP10.1 RN6.2 SHIFT7.13
2-12: JP10.3 RN6.3 SHIFT7.14
2-13: JP10.5 RN6.4 SHIFT7.3
2-14: JP10.7 RN6.5 SHIFT7.4
2-15: JP10.9 RN6.6 SHIFT7.5
2-16: JP10.11 RN6.7 SHIFT7.6
2-17: JP15.17 R33.1 SHIFT12.11
2-18: JP15.19 R34.1 SHIFT12.12
2-19: JP16.1 RN10.2 SHIFT12.13
2-20: JP16.3 RN10.3 SHIFT12.14
2-21: JP16.5 RN10.4 SHIFT12.3
2-22: JP16.7 RN10.5 SHIFT12.4
2-23: JP16.9 RN10.6 SHIFT12.5
2-24: JP16.11 RN10.7 SHIFT12.6
2-25: JP21.17 R41.1 SHIFT17.11
2-26: JP21.19 R42.1 SHIFT17.12
2-27: JP22.1 RN14.2 SHIFT17.13
2-28: JP22.3 RN14.3 SHIFT17.14
2-29: JP22.5 RN14.4 SHIFT17.3
2-30: JP22.7 RN14.5 SHIFT17.4
2-31: JP22.9 RN14.6 SHIFT17.5
2-32: JP22.11 RN14.7 SHIFT17.6
3-1: JP1.13 RN2.8 SHIFT3.11
3-2: JP1.15 RN2.9 SHIFT3.12
3-3: JP1.17 R12.1 SHIFT3.13
3-4: JP1.19 R13.1 SHIFT3.14
3-5: JP5.1 R6.1 SHIFT3.3
3-6: JP5.3 R7.1 SHIFT3.4
3-7: JP5.5 RN4.9 SHIFT3.5
3-8: JP5.7 RN4.8 SHIFT3.6
3-9: JP10.13 RN6.8 SHIFT8.11
3-10: JP10.15 RN6.9 SHIFT8.12
3-11: JP10.17 R26.1 SHIFT8.13
3-12: JP10.19 R27.1 SHIFT8.14
3-13: JP11.1 R20.1 SHIFT8.3
3-14: JP11.3 R21.1 SHIFT8.4
3-15: JP11.5 RN7.9 SHIFT8.5
3-16: JP11.7 RN7.8 SHIFT8.6
3-17: JP16.13 RN10.8 SHIFT13.11
3-18: JP16.15 RN10.9 SHIFT13.12
3-19: JP16.17 R35.1 SHIFT13.13
3-20: JP16.19 R36.1 SHIFT13.14
3-21: JP17.1 R28.1 SHIFT13.3
3-22: JP17.3 R29.1 SHIFT13.4
3-23: JP17.5 RN11.9 SHIFT13.5
3-24: JP17.7 RN11.8 SHIFT13.6
3-25: JP22.13 RN14.8 SHIFT18.11
3-26: JP22.15 RN14.9 SHIFT18.12
3-27: JP22.17 R43.1 SHIFT18.13
3-28: JP22.19 R44.1 SHIFT18.14
3-29: JP23.1 R37.1 SHIFT18.3
3-30: JP23.3 R38.1 SHIFT18.4
3-31: JP23.5 RN15.9 SHIFT18.5
3-32: JP23.7 RN15.8 SHIFT18.6
4-1: JP5.9 RN4.7 SHIFT4.11
4-2: JP5.11 RN4.6 SHIFT4.12
4-3: JP5.13 RN4.5 SHIFT4.13
4-4: JP5.15 RN4.4 SHIFT4.14
4-5: JP5.17 RN4.3 SHIFT4.3
4-6: JP5.19 RN4.2 SHIFT4.4
4-7: JP6.1 R8.1 SHIFT4.5
4-8: JP6.3 R9.1 SHIFT4.6
4-9: JP11.9 RN7.7 SHIFT9.11
4-10: JP11.11 RN7.6 SHIFT9.12
4-11: JP11.13 RN7.5 SHIFT9.13
4-12: JP11.15 RN7.4 SHIFT9.14
4-13: JP11.17 RN7.3 SHIFT9.3
4-14: JP11.19 RN7.2 SHIFT9.4
4-15: JP12.1 R22.1 SHIFT9.5
4-16: JP12.3 R23.1 SHIFT9.6
4-17: JP17.9 RN11.7 SHIFT14.11
4-18: JP17.11 RN11.6 SHIFT14.12
4-19: JP17.13 RN11.5 SHIFT14.13
4-20: JP17.15 RN11.4 SHIFT14.14
4-21: JP17.17 RN11.3 SHIFT14.3
4-22: JP17.19 RN11.2 SHIFT14.4
4-23: JP18.1 R31.1 SHIFT14.5
4-24: JP18.3 R32.1 SHIFT14.6
4-25: JP23.9 RN15.7 SHIFT19.11
4-26: JP23.11 RN15.6 SHIFT19.12
4-27: JP23.13 RN15.5 SHIFT19.13
4-28: JP23.15 RN15.4 SHIFT19.14
4-29: JP23.17 RN15.3 SHIFT19.3
4-30: JP23.19 RN15.2 SHIFT19.4
4-31: JP24.1 R39.1 SHIFT19.5
4-32: JP24.3 R40.1 SHIFT19.6
5-1: JP6.5 RN5.9 SHIFT5.11
5-2: JP6.7 RN5.8 SHIFT5.12
5-3: JP6.9 RN5.7 SHIFT5.13
5-4: JP6.11 RN5.6 SHIFT5.14
5-5: JP6.13 RN5.5 SHIFT5.3
5-6: JP6.15 RN5.4 SHIFT5.4
5-7: JP6.17 RN5.3 SHIFT5.5
5-8: JP6.19 RN5.2 SHIFT5.6
5-9: JP12.5 RN8.9 SHIFT10.11
5-10: JP12.7 RN8.8 SHIFT10.12
5-11: JP12.9 RN8.7 SHIFT10.13
5-12: JP12.11 RN8.6 SHIFT10.14
5-13: JP12.13 RN8.5 SHIFT10.3
5-14: JP12.15 RN8.4 SHIFT10.4
5-15: JP12.17 RN8.3 SHIFT10.5
5-16: JP12.19 RN8.2 SHIFT10.6
5-17: JP18.5 RN12.9 SHIFT15.11
5-18: JP18.7 RN12.8 SHIFT15.12
5-19: JP18.9 RN12.7 SHIFT15.13
5-20: JP18.11 RN12.6 SHIFT15.14
5-21: JP18.13 RN12.5 SHIFT15.3
5-22: JP18.15 RN12.4 SHIFT15.4
5-23: JP18.17 RN12.3 SHIFT15.5
5-24: JP18.19 RN12.2 SHIFT15.6
5-25: JP24.5 RN16.9 SHIFT20.11
5-26: JP24.7 RN16.8 SHIFT20.12
5-27: JP24.9 RN16.7 SHIFT20.13
5-28: JP24.11 RN16.6 SHIFT20.14
5-29: JP24.13 RN16.5 SHIFT20.3
5-30: JP24.15 RN16.4 SHIFT20.4
5-31: JP24.17 RN16.3 SHIFT20.5
5-32: JP24.19 RN16.2 SHIFT20.6
+3V1 [power]: C7-100U1.+ C8-100U1.+ DC2DC-3.VOUT ESP1.CHPD ESP1.VCC IC3.P$55 IC3.P$56 IC3.P$57 R20-1K1.2 R26-1K1.2
+3V3 [power]: C7-100U.+ C8-100U.+ DC2DC-1.VOUT ESP8266.CHPD ESP8266.VCC IC1.P$55 IC1.P$56 IC1.P$57 R20-1K.2 R26-1K.2
+12V [power]: 4-WAY_L-TERMINAL.1 4-WAY_L-TERMINAL.4 DC2DC-1.VIN DC2DC-2.VIN DC_JACKTHM.TIP
+12V1 [power]: J1.1 J1.4 J2.1 J2.4 JP1.22 JP1.24 JP1.26 JP3.22 JP3.24 JP3.26 JP5.22 JP5.24 JP5.26 JP6.22 JP6.24 JP6.26 U$1.INP#1 U$1.INP#2 U_OCA1.10 U_OCA2.10 U_OCA3.10 U_OCA4.10 U_OCA.10
+12V2 [power]: 4-WAY_L-TERMINAL1.1 4-WAY_L-TERMINAL1.4 DC2DC-3.VIN DC2DC-4.VIN DC_JACKTHM1.TIP
+12V3 [power]: J3.1 J3.4 J4.1 J4.4 JP9.22 JP9.24 JP9.26 JP10.22 JP10.24 JP10.26 JP11.22 JP11.24 JP11.26 JP12.22 JP12.24 JP12.26 U$3.INP#1 U$3.INP#2 U_OCA5.10 U_OCA6.10 U_OCA7.10 U_OCA8.10 U_OCA9.10
+12V4 [power]: J5.1 J5.4 J6.1 J6.4 JP15.22 JP15.24 JP15.26 JP16.22 JP16.24 JP16.26 JP17.22 JP17.24 JP17.26 JP18.22 JP18.24 JP18.26 U$5.INP#1 U$5.INP#2 U_OCA10.10 U_OCA11.10 U_OCA12.10 U_OCA13.10 U_OCA14.10
+12V5 [power]: J7.1 J7.4 J8.1 J8.4 JP21.22 JP21.24 JP21.26 JP22.22 JP22.24 JP22.26 JP23.22 JP23.24 JP23.26 JP24.22 JP24.24 JP24.26 U$7.INP#1 U$7.INP#2 U_OCA15.10 U_OCA16.10 U_OCA17.10 U_OCA18.10 U_OCA19.10
A-1: SHIFTOUTA.15 U_OCA.1
A-2: SHIFTOUTA.1 U_OCA.2
A-3: SHIFTOUTA.2 U_OCA.3
A-4: SHIFTOUTA.3 U_OCA.4
A-5: SHIFTOUTA.4 U_OCA.5
A-6: SHIFTOUTA.5 U_OCA.6
A-7: SHIFTOUTA.6 U_OCA.7
A-8: SHIFTOUTA.7 U_OCA.8
A-9: SHIFTOUTA1.7 U_OCA5.8
A-10: SHIFTOUTA1.5 U_OCA5.6
A-11: SHIFTOUTA1.4 U_OCA5.5
A-12: SHIFTOUTA1.3 U_OCA5.4
A-13: SHIFTOUTA1.2 U_OCA5.3
A-14: SHIFTOUTA1.1 U_OCA5.2
A-15: SHIFTOUTA1.15 U_OCA5.1
A-16: SHIFTOUTA1.6 U_OCA5.7
A-17: SHIFTOUTA2.7 U_OCA10.8
A-18: SHIFTOUTA2.5 U_OCA10.6
A-19: SHIFTOUTA2.4 U_OCA10.5
A-20: SHIFTOUTA2.3 U_OCA10.4
A-21: SHIFTOUTA2.2 U_OCA10.3
A-22: SHIFTOUTA2.1 U_OCA10.2
A-23: SHIFTOUTA2.15 U_OCA10.1
A-24: SHIFTOUTA2.6 U_OCA10.7
A-25: SHIFTOUTA3.7 U_OCA15.8
A-26: SHIFTOUTA3.5 U_OCA15.6
A-27: SHIFTOUTA3.4 U_OCA15.5
A-28: SHIFTOUTA3.3 U_OCA15.4
A-29: SHIFTOUTA3.2 U_OCA15.3
A-30: SHIFTOUTA3.1 U_OCA15.2
A-31: SHIFTOUTA3.15 U_OCA15.1
A-32: SHIFTOUTA3.6 U_OCA15.7
B-1: SHIFTOUTB.15 U_OCA1.1
B-2: SHIFTOUTB.1 U_OCA1.2
B-3: SHIFTOUTB.2 U_OCA1.3
B-4: SHIFTOUTB.3 U_OCA1.4
B-5: SHIFTOUTB.4 U_OCA1.5
B-6: SHIFTOUTB.5 U_OCA1.6
B-7: SHIFTOUTB.6 U_OCA1.7
B-8: SHIFTOUTB.7 U_OCA1.8
B-9: SHIFTOUTB1.7 U_OCA6.8
B-10: SHIFTOUTB1.6 U_OCA6.7
B-11: SHIFTOUTB1.5 U_OCA6.6
B-12: SHIFTOUTB1.4 U_OCA6.5
B-13: SHIFTOUTB1.3 U_OCA6.4
B-14: SHIFTOUTB1.2 U_OCA6.3
B-15: SHIFTOUTB1.1 U_OCA6.2
B-16: SHIFTOUTB1.15 U_OCA6.1
B-17: SHIFTOUTB2.7 U_OCA11.8
B-18: SHIFTOUTB2.6 U_OCA11.7
B-19: SHIFTOUTB2.5 U_OCA11.6
B-20: SHIFTOUTB2.4 U_OCA11.5
B-21: SHIFTOUTB2.3 U_OCA11.4
B-22: SHIFTOUTB2.2 U_OCA11.3
B-23: SHIFTOUTB2.1 U_OCA11.2
B-24: SHIFTOUTB2.15 U_OCA11.1
B-25: SHIFTOUTB3.7 U_OCA16.8
B-26: SHIFTOUTB3.6 U_OCA16.7
B-27: SHIFTOUTB3.5 U_OCA16.6
B-28: SHIFTOUTB3.4 U_OCA16.5
B-29: SHIFTOUTB3.3 U_OCA16.4
B-30: SHIFTOUTB3.2 U_OCA16.3
B-31: SHIFTOUTB3.1 U_OCA16.2
B-32: SHIFTOUTB3.15 U_OCA16.1
C-1: SHIFTOUTC.15 U_OCA2.1
C-2: SHIFTOUTC.1 U_OCA2.2
C-3: SHIFTOUTC.2 U_OCA2.3
C-4: SHIFTOUTC.3 U_OCA2.4
C-5: SHIFTOUTC.4 U_OCA2.5
C-6: SHIFTOUTC.5 U_OCA2.6
C-7: SHIFTOUTC.6 U_OCA2.7
C-8: SHIFTOUTC.7 U_OCA2.8
C-9: SHIFTOUTC1.15 U_OCA7.1
C-10: SHIFTOUTC1.1 U_OCA7.2
C-11: SHIFTOUTC1.2 U_OCA7.3
C-12: SHIFTOUTC1.3 U_OCA7.4
C-13: SHIFTOUTC1.4 U_OCA7.5
C-14: SHIFTOUTC1.5 U_OCA7.6
C-15: SHIFTOUTC1.6 U_OCA7.7
C-16: SHIFTOUTC1.7 U_OCA7.8
C-17: SHIFTOUTC2.15 U_OCA12.1
C-18: SHIFTOUTC2.1 U_OCA12.2
C-19: SHIFTOUTC2.2 U_OCA12.3
C-20: SHIFTOUTC2.3 U_OCA12.4
C-21: SHIFTOUTC2.4 U_OCA12.5
C-22: SHIFTOUTC2.5 U_OCA12.6
C-23: SHIFTOUTC2.6 U_OCA12.7
C-24: SHIFTOUTC2.7 U_OCA12.8
C-25: SHIFTOUTC3.15 U_OCA17.1
C-26: SHIFTOUTC3.1 U_OCA17.2
C-27: SHIFTOUTC3.2 U_OCA17.3
C-28: SHIFTOUTC3.3 U_OCA17.4
C-29: SHIFTOUTC3.4 U_OCA17.5
C-30: SHIFTOUTC3.5 U_OCA17.6
C-31: SHIFTOUTC3.6 U_OCA17.7
C-32: SHIFTOUTC3.7 U_OCA17.8
CE: ARDUINO_FOOTPRINT.8 JP4.5
CE1: JP2.5 JP7.5 SHIFT1.15 SHIFT2.15 SHIFT3.15 SHIFT4.15 SHIFT5.15
CE2: ARDUINO_FOOTPRINT1.8 JP8.5
CE3: JP13.5 JP14.5 SHIFT6.15 SHIFT7.15 SHIFT8.15 SHIFT9.15 SHIFT10.15
CE4: JP19.5 JP20.5 SHIFT11.15 SHIFT12.15 SHIFT13.15 SHIFT14.15 SHIFT15.15
CE5: JP25.5 JP26.5 SHIFT16.15 SHIFT17.15 SHIFT18.15 SHIFT19.15 SHIFT20.15
CLK: ARDUINO_FOOTPRINT.9 JP4.3
CLK1: JP2.3 JP7.3 SHIFT1.2 SHIFT2.2 SHIFT3.2 SHIFT4.2 SHIFT5.2
CLK2: ARDUINO_FOOTPRINT1.9 JP8.3
CLK3: JP13.3 JP14.3 SHIFT6.2 SHIFT7.2 SHIFT8.2 SHIFT9.2 SHIFT10.2
CLK4: JP19.3 JP20.3 SHIFT11.2 SHIFT12.2 SHIFT13.2 SHIFT14.2 SHIFT15.2
CLK5: JP25.3 JP26.3 SHIFT16.2 SHIFT17.2 SHIFT18.2 SHIFT19.2 SHIFT20.2
CTRL_SIMRESET: ARDUINO_FOOTPRINT.A2 R2.1
CTRL_SIMRESET1: ARDUINO_FOOTPRINT1.A2 R15.1
D-1: SHIFTOUTD.15 U_OCA3.1
D-2: SHIFTOUTD.1 U_OCA3.2
D-3: SHIFTOUTD.2 U_OCA3.3
D-4: SHIFTOUTD.3 U_OCA3.4
D-5: SHIFTOUTD.4 U_OCA3.5
D-6: SHIFTOUTD.5 U_OCA3.6
D-7: SHIFTOUTD.6 U_OCA3.7
D-8: SHIFTOUTD.7 U_OCA3.8
D-9: SHIFTOUTD1.15 U_OCA8.1
D-10: SHIFTOUTD1.1 U_OCA8.2
D-11: SHIFTOUTD1.2 U_OCA8.3
D-12: SHIFTOUTD1.3 U_OCA8.4
D-13: SHIFTOUTD1.4 U_OCA8.5
D-14: SHIFTOUTD1.5 U_OCA8.6
D-15: SHIFTOUTD1.6 U_OCA8.7
D-16: SHIFTOUTD1.7 U_OCA8.8
D-17: SHIFTOUTD2.15 U_OCA13.1
D-18: SHIFTOUTD2.1 U_OCA13.2
D-19: SHIFTOUTD2.2 U_OCA13.3
D-20: SHIFTOUTD2.3 U_OCA13.4
D-21: SHIFTOUTD2.4 U_OCA13.5
D-22: SHIFTOUTD2.5 U_OCA13.6
D-23: SHIFTOUTD2.6 U_OCA13.7
D-24: SHIFTOUTD2.7 U_OCA13.8
D-25: SHIFTOUTD3.15 U_OCA18.1
D-26: SHIFTOUTD3.1 U_OCA18.2
D-27: SHIFTOUTD3.2 U_OCA18.3
D-28: SHIFTOUTD3.3 U_OCA18.4
D-29: SHIFTOUTD3.4 U_OCA18.5
D-30: SHIFTOUTD3.5 U_OCA18.6
D-31: SHIFTOUTD3.6 U_OCA18.7
D-32: SHIFTOUTD3.7 U_OCA18.8
E-1: SHIFTOUTE.15 U_OCA4.1
E-2: SHIFTOUTE.1 U_OCA4.2
E-3: SHIFTOUTE.2 U_OCA4.3
E-4: SHIFTOUTE.3 U_OCA4.4
E-5: SHIFTOUTE.4 U_OCA4.5
E-6: SHIFTOUTE.5 U_OCA4.6
E-7: SHIFTOUTE.6 U_OCA4.7
E-8: SHIFTOUTE.7 U_OCA4.8
E-9: SHIFTOUTE1.15 U_OCA9.1
E-10: SHIFTOUTE1.1 U_OCA9.2
E-11: SHIFTOUTE1.2 U_OCA9.3
E-12: SHIFTOUTE1.3 U_OCA9.4
E-13: SHIFTOUTE1.4 U_OCA9.5
E-14: SHIFTOUTE1.7 U_OCA9.8
E-15: SHIFTOUTE1.6 U_OCA9.7
E-16: SHIFTOUTE1.5 U_OCA9.6
E-17: SHIFTOUTE2.15 U_OCA14.1
E-18: SHIFTOUTE2.1 U_OCA14.2
E-19: SHIFTOUTE2.2 U_OCA14.3
E-20: SHIFTOUTE2.3 U_OCA14.4
E-21: SHIFTOUTE2.4 U_OCA14.5
E-22: SHIFTOUTE2.7 U_OCA14.8
E-23: SHIFTOUTE2.6 U_OCA14.7
E-24: SHIFTOUTE2.5 U_OCA14.6
E-25: SHIFTOUTE3.15 U_OCA19.1
E-26: SHIFTOUTE3.1 U_OCA19.2
E-27: SHIFTOUTE3.2 U_OCA19.3
E-28: SHIFTOUTE3.3 U_OCA19.4
E-29: SHIFTOUTE3.4 U_OCA19.5
E-30: SHIFTOUTE3.7 U_OCA19.8
E-31: SHIFTOUTE3.6 U_OCA19.7
E-32: SHIFTOUTE3.5 U_OCA19.6
ESP_RX: ESP8266.RXD R1-1K1.1 R5-2K1.2
ESP_RX1: ESP1.RXD R1-1K3.1 R5-2K3.2
ESP_TX: ARDUINO_FOOTPRINT.19 ESP8266.TXD
ESP_TX1: ARDUINO_FOOTPRINT1.19 ESP1.TXD
GND [GND]: 4-WAY_L-TERMINAL.2 4-WAY_L-TERMINAL.3 ARDUINO_FOOTPRINT.GND@0 ARDUINO_FOOTPRINT.GND@1 ARDUINO_FOOTPRINT.GND@2 ARDUINO_FOOTPRINT.GND@3 ARDUINO_FOOTPRINT.GND@4 BAT1.2 C7-100U.- C8-100U.- C9.2 C10-4U7.2 C11.2 CSIM_22P.1 CSIM_100N.1 D15.2 DC2DC-1.GND#0 DC2DC-1.GND#1 DC2DC-2.GND#0 DC2DC-2.GND#1 DC_JACKTHM.RING DC_JACKTHM.RING_SW ESP8266.GND IC1.P$17 IC1.P$18 IC1.P$29 IC1.P$39 IC1.P$45 IC1.P$46 IC1.P$53 IC1.P$54 IC1.P$58 IC1.P$59 IC1.P$61 IC1.P$62 IC1.P$63 IC1.P$64 IC1.P$65 IC2.4 IN.C JP4.9 MODE_SELECT.1 MODE_SELECT.2 OUT.C R5-2K1.1 R5-2K.1 R25-10K.2 R28-10K.2 S1.3 S1.4 SIM_HOLDER.GND T1.E T2.E T3.E T9.E U1.4 X1.GND1 X1.GND2 X1.GND3 X1.GND4
GND1 [GND]: C1.1 C2.1 C3.1 C4.1 C5.1 C6.1 C7.1 C8.1 C10.1 C12.1 J1.2 J1.3 J2.2 J2.3 JP1.21 JP1.23 JP1.25 JP2.9 JP3.21 JP3.23 JP3.25 JP5.21 JP5.23 JP5.25 JP6.21 JP6.23 JP6.25 JP7.9 SHIFT1.8 SHIFT2.8 SHIFT3.8 SHIFT4.8 SHIFT5.8 SHIFTOUTA.8 SHIFTOUTB.8 SHIFTOUTC.8 SHIFTOUTD.8 SHIFTOUTE.8 U$1.INM#1 U$1.INM#2 U$1.OUTM#1 U$1.OUTM#2 U_OCA1.9 U_OCA2.9 U_OCA3.9 U_OCA4.9 U_OCA.9
GND2 [GND]: 4-WAY_L-TERMINAL1.2 4-WAY_L-TERMINAL1.3 ARDUINO_FOOTPRINT1.GND@0 ARDUINO_FOOTPRINT1.GND@1 ARDUINO_FOOTPRINT1.GND@2 ARDUINO_FOOTPRINT1.GND@3 ARDUINO_FOOTPRINT1.GND@4 BAT2.2 C7-100U1.- C8-100U1.- C10-4U1.2 C13.2 C14.2 CSIM_22P1.1 CSIM_100N1.1 D1.2 DC2DC-3.GND#0 DC2DC-3.GND#1 DC2DC-4.GND#0 DC2DC-4.GND#1 DC_JACKTHM1.RING DC_JACKTHM1.RING_SW ESP1.GND IC3.P$17 IC3.P$18 IC3.P$29 IC3.P$39 IC3.P$45 IC3.P$46 IC3.P$53 IC3.P$54 IC3.P$58 IC3.P$59 IC3.P$61 IC3.P$62 IC3.P$63 IC3.P$64 IC3.P$65 IC4.4 IN1.C JP8.9 MODE_SELECT1.1 MODE_SELECT1.2 OUT1.C R5-2K2.1 R5-2K3.1 R25-10K1.2 R28-10K1.2 S2.3 S2.4 SIM_HOLDER1.GND T4.E T5.E T6.E T7.E U2.4 X2.GND1 X2.GND2 X2.GND3 X2.GND4
GND3 [GND]: C15.1 C16.1 C17.1 C18.1 C19.1 C20.1 C21.1 C22.1 C23.1 C24.1 J3.2 J3.3 J4.2 J4.3 JP9.21 JP9.23 JP9.25 JP10.21 JP10.23 JP10.25 JP11.21 JP11.23 JP11.25 JP12.21 JP12.23 JP12.25 JP13.9 JP14.9 SHIFT6.8 SHIFT7.8 SHIFT8.8 SHIFT9.8 SHIFT10.8 SHIFTOUTA1.8 SHIFTOUTB1.8 SHIFTOUTC1.8 SHIFTOUTD1.8 SHIFTOUTE1.8 U$3.INM#1 U$3.INM#2 U$3.OUTM#1 U$3.OUTM#2 U_OCA5.9 U_OCA6.9 U_OCA7.9 U_OCA8.9 U_OCA9.9
GND4 [GND]: C25.1 C26.1 C27.1 C28.1 C29.1 C30.1 C31.1 C32.1 C33.1 C34.1 J5.2 J5.3 J6.2 J6.3 JP15.21 JP15.23 JP15.25 JP16.21 JP16.23 JP16.25 JP17.21 JP17.23 JP17.25 JP18.21 JP18.23 JP18.25 JP19.9 JP20.9 SHIFT11.8 SHIFT12.8 SHIFT13.8 SHIFT14.8 SHIFT15.8 SHIFTOUTA2.8 SHIFTOUTB2.8 SHIFTOUTC2.8 SHIFTOUTD2.8 SHIFTOUTE2.8 U$5.INM#1 U$5.INM#2 U$5.OUTM#1 U$5.OUTM#2 U_OCA10.9 U_OCA11.9 U_OCA12.9 U_OCA13.9 U_OCA14.9
GND5 [GND]: C35.1 C36.1 C37.1 C38.1 C39.1 C40.1 C41.1 C42.1 C43.1 C44.1 J7.2 J7.3 J8.2 J8.3 JP21.21 JP21.23 JP21.25 JP22.21 JP22.23 JP22.25 JP23.21 JP23.23 JP23.25 JP24.21 JP24.23 JP24.25 JP25.9 JP26.9 SHIFT16.8 SHIFT17.8 SHIFT18.8 SHIFT19.8 SHIFT20.8 SHIFTOUTA3.8 SHIFTOUTB3.8 SHIFTOUTC3.8 SHIFTOUTD3.8 SHIFTOUTE3.8 U$7.INM#1 U$7.INM#2 U$7.OUTM#1 U$7.OUTM#2 U_OCA15.9 U_OCA16.9 U_OCA17.9 U_OCA18.9 U_OCA19.9
GPIO1: IC3.P$67
GPIO2: IC3.P$68
GPIO11: IC1.P$67
GPIO12: IC1.P$68
MR: ARDUINO_FOOTPRINT.6 JP4.10
MR1 [power]: JP2.10 JP7.10 SHIFTOUTA.10 SHIFTOUTB.10 SHIFTOUTC.10 SHIFTOUTD.10 SHIFTOUTE.10
MR2: ARDUINO_FOOTPRINT1.6 JP8.10
MR3 [power]: JP13.10 JP14.10 SHIFTOUTA1.10 SHIFTOUTB1.10 SHIFTOUTC1.10 SHIFTOUTD1.10 SHIFTOUTE1.10
MR4 [power]: JP19.10 JP20.10 SHIFTOUTA2.10 SHIFTOUTB2.10 SHIFTOUTC2.10 SHIFTOUTD2.10 SHIFTOUTE2.10
MR5 [power]: JP25.10 JP26.10 SHIFTOUTA3.10 SHIFTOUTB3.10 SHIFTOUTC3.10 SHIFTOUTD3.10 SHIFTOUTE3.10
N$1: ARDUINO_FOOTPRINT.16 R1-1K.2
N$2: IC1.P$31 R11-22.1
N$3: IC1.P$32 R10-22.1
N$4: IC1.P$33 R9-22.1
N$5: C10-4U7.1 IC1.P$26
N$6: IC1.P$60 X1.ANTENNA
N$8: R20-1K.1 STATUS.A
N$9: STATUS.C T1.C
N$10: R23-1K.1 R25-10K.1 T1.B
N$11: NETLIGHT.A R26-1K.1
N$12: NETLIGHT.C T2.C
N$13: R27-1K.1 R28-10K.1 T2.B
N$14: R30.2 T9.B
N$15: R2.2 T3.B
N$16: Q1.1 U1.2
N$19: Q1.2 U1.1
N$20: ARDUINO_FOOTPRINT.18 R1-1K1.2
N$21: IC2.1 IC2.3 R1.1
N$23: BAT1.1 U1.3
N$24: IC2.5 IC2.7 R3.1
N$25: OUT.A R1.2
N$26: IN.A R3.2
N$27: A-GRN.A R4.1
N$28: B-YLW.A R5.1
N$29: SHIFT2.10 SHIFT3.9
N$30: SHIFT3.10 SHIFT4.9
N$31: SHIFT4.10 SHIFT5.9
N$32: SHIFTOUTA.9 SHIFTOUTB.14
N$33: SHIFTOUTC.9 SHIFTOUTD.14
N$37: SHIFTOUTB.9 SHIFTOUTC.14
N$38: SHIFTOUTD.9 SHIFTOUTE.14
N$40: U$1.OUTP#1 U$1.OUTP#2 U$2.PAD1
N$41: IC3.P$31 R11-1.1
N$42: IC3.P$32 R10-1.1
N$47: IC3.P$33 R9-1.1
N$48: C10-4U1.1 IC3.P$26
N$49: IC3.P$60 X2.ANTENNA
N$50: SHIFT1.10 SHIFT2.9
N$51: R20-1K1.1 STATUS1.A
N$52: STATUS1.C T4.C
N$53: R23-1K1.1 R25-10K1.1 T4.B
N$54: NETLIGHT1.A R26-1K1.1
N$56: NETLIGHT1.C T5.C
N$57: R27-1K1.1 R28-10K1.1 T5.B
N$58: R14.2 T6.B
N$59: R15.2 T7.B
N$60: BAT2.1 U2.3
N$61: Q2.1 U2.2
N$62: Q2.2 U2.1
N$65: IC4.1 IC4.3 R16.1
N$66: IC4.5 IC4.7 R17.1
N$67: OUT1.A R16.2
N$68: IN1.A R17.2
N$69: A-GRN1.A R18.1
N$70: B-YLW1.A R19.1
N$71: ARDUINO_FOOTPRINT1.18 R1-1K3.2
N$72: ARDUINO_FOOTPRINT1.16 R1-1K2.2
N$73: SHIFT6.10 SHIFT7.9
N$74: SHIFT7.10 SHIFT8.9
N$75: SHIFT8.10 SHIFT9.9
N$76: SHIFT9.10 SHIFT10.9
N$77: SHIFTOUTA1.9 SHIFTOUTB1.14
N$78: SHIFTOUTC1.9 SHIFTOUTD1.14
N$79: SHIFTOUTB1.9 SHIFTOUTC1.14
N$80: SHIFTOUTD1.9 SHIFTOUTE1.14
N$85: U$3.OUTP#1 U$3.OUTP#2 U$4.PAD1
N$86: SHIFT11.10 SHIFT12.9
N$87: SHIFT12.10 SHIFT13.9
N$88: SHIFT13.10 SHIFT14.9
N$89: SHIFT14.10 SHIFT15.9
N$90: SHIFTOUTA2.9 SHIFTOUTB2.14
N$91: SHIFTOUTC2.9 SHIFTOUTD2.14
N$92: SHIFTOUTB2.9 SHIFTOUTC2.14
N$93: SHIFTOUTD2.9 SHIFTOUTE2.14
N$98: U$5.OUTP#1 U$5.OUTP#2 U$6.PAD1
N$99: SHIFT16.10 SHIFT17.9
N$100: SHIFT17.10 SHIFT18.9
N$101: SHIFT18.10 SHIFT19.9
N$102: SHIFT19.10 SHIFT20.9
N$103: SHIFTOUTA3.9 SHIFTOUTB3.14
N$104: SHIFTOUTC3.9 SHIFTOUTD3.14
N$105: SHIFTOUTB3.9 SHIFTOUTC3.14
N$106: SHIFTOUTD3.9 SHIFTOUTE3.14
N$111: U$7.OUTP#1 U$7.OUTP#2 U$8.PAD1
OE: ARDUINO_FOOTPRINT.2 JP4.2
OE1 [GND]: JP2.2 JP7.2 SHIFTOUTA.13 SHIFTOUTB.13 SHIFTOUTC.13 SHIFTOUTD.13 SHIFTOUTE.13
OE2: ARDUINO_FOOTPRINT1.2 JP8.2
OE3 [GND]: JP13.2 JP14.2 SHIFTOUTA1.13 SHIFTOUTB1.13 SHIFTOUTC1.13 SHIFTOUTD1.13 SHIFTOUTE1.13
OE4 [GND]: JP19.2 JP20.2 SHIFTOUTA2.13 SHIFTOUTB2.13 SHIFTOUTC2.13 SHIFTOUTD2.13 SHIFTOUTE2.13
OE5 [GND]: JP25.2 JP26.2 SHIFTOUTA3.13 SHIFTOUTB3.13 SHIFTOUTC3.13 SHIFTOUTD3.13 SHIFTOUTE3.13
OUTA1: JP3.2 U_OCA.18
OUTA2: JP3.4 U_OCA.17
OUTA3: JP3.6 U_OCA.16
OUTA4: JP3.8 U_OCA.15
OUTA5: JP3.10 U_OCA.14
OUTA6: JP3.12 U_OCA.13
OUTA7: JP3.14 U_OCA.12
OUTA8: JP3.16 U_OCA.11
OUTA9: JP9.2 U_OCA5.18
OUTA10: JP9.4 U_OCA5.17
OUTA11: JP9.6 U_OCA5.16
OUTA12: JP9.8 U_OCA5.15
OUTA13: JP9.10 U_OCA5.14
OUTA14: JP9.12 U_OCA5.13
OUTA15: JP9.14 U_OCA5.12
OUTA16: JP9.16 U_OCA5.11
OUTA17: JP15.2 U_OCA10.18
OUTA18: JP15.4 U_OCA10.17
OUTA19: JP15.6 U_OCA10.16
OUTA20: JP15.8 U_OCA10.15
OUTA21: JP15.10 U_OCA10.14
OUTA22: JP15.12 U_OCA10.13
OUTA23: JP15.14 U_OCA10.12
OUTA24: JP15.16 U_OCA10.11
OUTA25: JP21.2 U_OCA15.18
OUTA26: JP21.4 U_OCA15.17
OUTA27: JP21.6 U_OCA15.16
OUTA28: JP21.8 U_OCA15.15
OUTA29: JP21.10 U_OCA15.14
OUTA30: JP21.12 U_OCA15.13
OUTA31: JP21.14 U_OCA15.12
OUTA32: JP21.16 U_OCA15.11
OUTB1: JP3.18 U_OCA1.18
OUTB2: JP3.20 U_OCA1.17
OUTB3: JP1.2 U_OCA1.16
OUTB4: JP1.4 U_OCA1.15
OUTB5: JP1.6 U_OCA1.14
OUTB6: JP1.8 U_OCA1.13
OUTB7: JP1.10 U_OCA1.12
OUTB8: JP1.12 U_OCA1.11
OUTB9: JP9.18 U_OCA6.18
OUTB10: JP9.20 U_OCA6.17
OUTB11: JP10.2 U_OCA6.16
OUTB12: JP10.4 U_OCA6.15
OUTB13: JP10.6 U_OCA6.14
OUTB14: JP10.8 U_OCA6.13
OUTB15: JP10.10 U_OCA6.12
OUTB16: JP10.12 U_OCA6.11
OUTB17: JP15.18 U_OCA11.18
OUTB18: JP15.20 U_OCA11.17
OUTB19: JP16.2 U_OCA11.16
OUTB20: JP16.4 U_OCA11.15
OUTB21: JP16.6 U_OCA11.14
OUTB22: JP16.8 U_OCA11.13
OUTB23: JP16.10 U_OCA11.12
OUTB24: JP16.12 U_OCA11.11
OUTB25: JP21.18 U_OCA16.18
OUTB26: JP21.20 U_OCA16.17
OUTB27: JP22.2 U_OCA16.16
OUTB28: JP22.4 U_OCA16.15
OUTB29: JP22.6 U_OCA16.14
OUTB30: JP22.8 U_OCA16.13
OUTB31: JP22.10 U_OCA16.12
OUTB32: JP22.12 U_OCA16.11
OUTC1: JP1.14 U_OCA2.18
OUTC2: JP1.16 U_OCA2.17
OUTC3: JP1.18 U_OCA2.16
OUTC4: JP1.20 U_OCA2.15
OUTC5: JP5.2 U_OCA2.14
OUTC6: JP5.4 U_OCA2.13
OUTC7: JP5.6 U_OCA2.12
OUTC8: JP5.8 U_OCA2.11
OUTC9: JP10.14 U_OCA7.18
OUTC10: JP10.16 U_OCA7.17
OUTC11: JP10.18 U_OCA7.16
OUTC12: JP10.20 U_OCA7.15
OUTC13: JP11.2 U_OCA7.14
OUTC14: JP11.4 U_OCA7.13
OUTC15: JP11.6 U_OCA7.12
OUTC16: JP11.8 U_OCA7.11
OUTC17: JP16.14 U_OCA12.18
OUTC18: JP16.16 U_OCA12.17
OUTC19: JP16.18 U_OCA12.16
OUTC20: JP16.20 U_OCA12.15
OUTC21: JP17.2 U_OCA12.14
OUTC22: JP17.4 U_OCA12.13
OUTC23: JP17.6 U_OCA12.12
OUTC24: JP17.8 U_OCA12.11
OUTC25: JP22.14 U_OCA17.18
OUTC26: JP22.16 U_OCA17.17
OUTC27: JP22.18 U_OCA17.16
OUTC28: JP22.20 U_OCA17.15
OUTC29: JP23.2 U_OCA17.14
OUTC30: JP23.4 U_OCA17.13
OUTC31: JP23.6 U_OCA17.12
OUTC32: JP23.8 U_OCA17.11
OUTD1: JP5.10 U_OCA3.18
OUTD2: JP5.12 U_OCA3.17
OUTD3: JP5.14 U_OCA3.16
OUTD4: JP5.16 U_OCA3.15
OUTD5: JP5.18 U_OCA3.14
OUTD6: JP5.20 U_OCA3.13
OUTD7: JP6.2 U_OCA3.12
OUTD8: JP6.4 U_OCA3.11
OUTD9: JP11.10 U_OCA8.18
OUTD10: JP11.12 U_OCA8.17
OUTD11: JP11.14 U_OCA8.16
OUTD12: JP11.16 U_OCA8.15
OUTD13: JP11.18 U_OCA8.14
OUTD14: JP11.20 U_OCA8.13
OUTD15: JP12.2 U_OCA8.12
OUTD16: JP12.4 U_OCA8.11
OUTD17: JP17.10 U_OCA13.18
OUTD18: JP17.12 U_OCA13.17
OUTD19: JP17.14 U_OCA13.16
OUTD20: JP17.16 U_OCA13.15
OUTD21: JP17.18 U_OCA13.14
OUTD22: JP17.20 U_OCA13.13
OUTD23: JP18.2 U_OCA13.12
OUTD24: JP18.4 U_OCA13.11
OUTD25: JP23.10 U_OCA18.18
OUTD26: JP23.12 U_OCA18.17
OUTD27: JP23.14 U_OCA18.16
OUTD28: JP23.16 U_OCA18.15
OUTD29: JP23.18 U_OCA18.14
OUTD30: JP23.20 U_OCA18.13
OUTD31: JP24.2 U_OCA18.12
OUTD32: JP24.4 U_OCA18.11
OUTE1: JP6.6 U_OCA4.18
OUTE2: JP6.8 U_OCA4.17
OUTE3: JP6.10 U_OCA4.16
OUTE4: JP6.12 U_OCA4.15
OUTE5: JP6.14 U_OCA4.14
OUTE6: JP6.16 U_OCA4.13
OUTE7: JP6.18 U_OCA4.12
OUTE8: JP6.20 U_OCA4.11
OUTE9: JP12.6 U_OCA9.18
OUTE10: JP12.10 U_OCA9.16
OUTE11: JP12.8 U_OCA9.17
OUTE12: JP12.12 U_OCA9.15
OUTE13: JP12.14 U_OCA9.14
OUTE14: JP12.16 U_OCA9.13
OUTE15: JP12.18 U_OCA9.12
OUTE16: JP12.20 U_OCA9.11
OUTE17: JP18.6 U_OCA14.18
OUTE18: JP18.10 U_OCA14.16
OUTE19: JP18.8 U_OCA14.17
OUTE20: JP18.12 U_OCA14.15
OUTE21: JP18.14 U_OCA14.14
OUTE22: JP18.16 U_OCA14.13
OUTE23: JP18.18 U_OCA14.12
OUTE24: JP18.20 U_OCA14.11
OUTE25: JP24.6 U_OCA19.18
OUTE26: JP24.10 U_OCA19.16
OUTE27: JP24.8 U_OCA19.17
OUTE28: JP24.12 U_OCA19.15
OUTE29: JP24.14 U_OCA19.14
OUTE30: JP24.16 U_OCA19.13
OUTE31: JP24.18 U_OCA19.12
OUTE32: JP24.20 U_OCA19.11
PL: ARDUINO_FOOTPRINT.7 JP4.7
PL1: JP2.7 JP7.7 SHIFT1.1 SHIFT2.1 SHIFT3.1 SHIFT4.1 SHIFT5.1
PL2: ARDUINO_FOOTPRINT1.7 JP8.7
PL3: JP13.7 JP14.7 SHIFT6.1 SHIFT7.1 SHIFT8.1 SHIFT9.1 SHIFT10.1
PL4: JP19.7 JP20.7 SHIFT11.1 SHIFT12.1 SHIFT13.1 SHIFT14.1 SHIFT15.1
PL5: JP25.7 JP26.7 SHIFT16.1 SHIFT17.1 SHIFT18.1 SHIFT19.1 SHIFT20.1
PWRKEY: ARDUINO_FOOTPRINT.11 R30.1
PWRKEY1: ARDUINO_FOOTPRINT1.11 R14.1
Q1: JP2.1 SHIFT1.9
Q2: ARDUINO_FOOTPRINT1.10 IC4.2 JP8.1
Q3: JP13.1 SHIFT6.9
Q4: JP19.1 SHIFT11.9
Q5: JP25.1 SHIFT16.9
Q7: ARDUINO_FOOTPRINT.10 IC2.2 JP4.1
Q7_1: JP14.1 SHIFT10.10
Q7_2: JP7.1 SHIFT5.10
Q7_3: JP20.1 SHIFT15.10
Q7_4: JP26.1 SHIFT20.10
SCL: ARDUINO_FOOTPRINT.21 R2K2_SCL.2 U1.6
SCL1: ARDUINO_FOOTPRINT1.21 R2K2_SCL1.2 U2.6
SDA: ARDUINO_FOOTPRINT.20 R2K2_SDA.2 U1.5
SDA1: ARDUINO_FOOTPRINT1.20 R2K2_SDA1.2 U2.5
SHCP: ARDUINO_FOOTPRINT.5 JP4.8
SHCP1: JP2.8 JP7.8 SHIFTOUTA.11 SHIFTOUTB.11 SHIFTOUTC.11 SHIFTOUTD.11 SHIFTOUTE.11
SHCP2: ARDUINO_FOOTPRINT1.5 JP8.8
SHCP3: JP13.8 JP14.8 SHIFTOUTA1.11 SHIFTOUTB1.11 SHIFTOUTC1.11 SHIFTOUTD1.11 SHIFTOUTE1.11
SHCP4: JP19.8 JP20.8 SHIFTOUTA2.11 SHIFTOUTB2.11 SHIFTOUTC2.11 SHIFTOUTD2.11 SHIFTOUTE2.11
SHCP5: JP25.8 JP26.8 SHIFTOUTA3.11 SHIFTOUTB3.11 SHIFTOUTC3.11 SHIFTOUTD3.11 SHIFTOUTE3.11
SIM_NETLIGHT: IC1.P$52 R27-1K.2
SIM_NETLIGHT1: IC3.P$52 R27-1K1.2
SIM_PWRKEY: IC1.P$1 S1.1 S1.2 T9.C
SIM_PWRKEY1: IC3.P$1 S2.1 S2.2 T6.C
SIM_RESET: IC1.P$16 T3.C
SIM_RESET1: IC3.P$16 T7.C
SIM_RX: IC1.P$10 R1-1K.1 R5-2K.2
SIM_RX1: IC3.P$10 R1-1K2.1 R5-2K2.2
SIM_STATUS: IC1.P$66 R23-1K.2
SIM_STATUS1: IC3.P$66 R23-1K1.2
SIM_TX: ARDUINO_FOOTPRINT.17 IC1.P$9
SIM_TX1: ARDUINO_FOOTPRINT1.17 IC3.P$9
SR_DS: ARDUINO_FOOTPRINT.3 IC2.6 JP4.4
SR_DS1: JP2.4 SHIFTOUTA.14
SR_DS2: ARDUINO_FOOTPRINT1.3 IC4.6 JP8.4
SR_DS3: JP13.4 SHIFTOUTA1.14
SR_DS4: JP19.4 SHIFTOUTA2.14
SR_DS5: JP25.4 SHIFTOUTA3.14
SR_DS_1: JP14.4 SHIFTOUTE1.9
SR_DS_2: JP7.4 SHIFTOUTE.9
SR_DS_3: JP20.4 SHIFTOUTE2.9
SR_DS_4: JP26.4 SHIFTOUTE3.9
STATE_A: A-GRN.C ARDUINO_FOOTPRINT.A3 MODE_SELECT.3
STATE_A1: A-GRN1.C ARDUINO_FOOTPRINT1.A3 MODE_SELECT1.3
STATE_B: ARDUINO_FOOTPRINT.A4 B-YLW.C MODE_SELECT.4
STATE_B1: ARDUINO_FOOTPRINT1.A4 B-YLW1.C MODE_SELECT1.4
STCP: ARDUINO_FOOTPRINT.4 JP4.6
STCP1: JP2.6 JP7.6 SHIFTOUTA.12 SHIFTOUTB.12 SHIFTOUTC.12 SHIFTOUTD.12 SHIFTOUTE.12
STCP2: ARDUINO_FOOTPRINT1.4 JP8.6
STCP3: JP13.6 JP14.6 SHIFTOUTA1.12 SHIFTOUTB1.12 SHIFTOUTC1.12 SHIFTOUTD1.12 SHIFTOUTE1.12
STCP4: JP19.6 JP20.6 SHIFTOUTA2.12 SHIFTOUTB2.12 SHIFTOUTC2.12 SHIFTOUTD2.12 SHIFTOUTE2.12
STCP5: JP25.6 JP26.6 SHIFTOUTA3.12 SHIFTOUTB3.12 SHIFTOUTC3.12 SHIFTOUTD3.12 SHIFTOUTE3.12
USIM_CLK: D15.4 R10-22.2 SIM_HOLDER.CLK
USIM_CLK1: D1.4 R10-1.2 SIM_HOLDER1.CLK
USIM_DATA: D15.1 R11-22.2 SIM_HOLDER.I/O
USIM_DATA1: D1.1 R11-1.2 SIM_HOLDER1.I/O
USIM_RESET: D15.3 R9-22.2 SIM_HOLDER.RST
USIM_RESET1: D1.3 R9-1.2 SIM_HOLDER1.RST
USIM_VCC: C9.1 C11.1 CSIM_22P.2 CSIM_100N.2 D15.5 IC1.P$30 SIM_HOLDER.VCC
USIM_VCC1: C13.1 C14.1 CSIM_22P1.2 CSIM_100N1.2 D1.5 IC3.P$30 SIM_HOLDER1.VCC
VCC [power]: ARDUINO_FOOTPRINT.5V@0 ARDUINO_FOOTPRINT.5V@1 ARDUINO_FOOTPRINT.5V@2 DC2DC-2.VOUT IC2.8 R2K2_SCL.1 R2K2_SDA.1 R4.2 R5.2 U1.8
VCC1 [power]: C1.2 C2.2 C3.2 C4.2 C5.2 C6.2 C7.2 C8.2 C10.2 C12.2 R6.2 R7.2 R8.2 R9.2 R10.2 R11.2 R12.2 R13.2 RN1.1 RN2.1 RN4.1 RN5.1 SHIFT1.16 SHIFT2.16 SHIFT3.16 SHIFT4.16 SHIFT5.16 SHIFTOUTA.16 SHIFTOUTB.16 SHIFTOUTC.16 SHIFTOUTD.16 SHIFTOUTE.16 U$2.PAD2
VCC2 [power]: ARDUINO_FOOTPRINT1.5V@0 ARDUINO_FOOTPRINT1.5V@1 ARDUINO_FOOTPRINT1.5V@2 DC2DC-4.VOUT IC4.8 R2K2_SCL1.1 R2K2_SDA1.1 R18.2 R19.2 U2.8
VCC3 [power]: C15.2 C16.2 C17.2 C18.2 C19.2 C20.2 C21.2 C22.2 C23.2 C24.2 R20.2 R21.2 R22.2 R23.2 R24.2 R25.2 R26.2 R27.2 RN3.1 RN6.1 RN7.1 RN8.1 SHIFT6.16 SHIFT7.16 SHIFT8.16 SHIFT9.16 SHIFT10.16 SHIFTOUTA1.16 SHIFTOUTB1.16 SHIFTOUTC1.16 SHIFTOUTD1.16 SHIFTOUTE1.16 U$4.PAD2
VCC4 [power]: C25.2 C26.2 C27.2 C28.2 C29.2 C30.2 C31.2 C32.2 C33.2 C34.2 R28.2 R29.2 R31.2 R32.2 R33.2 R34.2 R35.2 R36.2 RN9.1 RN10.1 RN11.1 RN12.1 SHIFT11.16 SHIFT12.16 SHIFT13.16 SHIFT14.16 SHIFT15.16 SHIFTOUTA2.16 SHIFTOUTB2.16 SHIFTOUTC2.16 SHIFTOUTD2.16 SHIFTOUTE2.16 U$6.PAD2
VCC5 [power]: C35.2 C36.2 C37.2 C38.2 C39.2 C40.2 C41.2 C42.2 C43.2 C44.2 R37.2 R38.2 R39.2 R40.2 R41.2 R42.2 R43.2 R44.2 RN13.1 RN14.1 RN15.1 RN16.1 SHIFT16.16 SHIFT17.16 SHIFT18.16 SHIFT19.16 SHIFT20.16 SHIFTOUTA3.16 SHIFTOUTB3.16 SHIFTOUTC3.16 SHIFTOUTD3.16 SHIFTOUTE3.16 U$8.PAD2
VIN: ARDUINO_FOOTPRINT.VIN
VIN1: ARDUINO_FOOTPRINT1.VIN

## Tracks (layer width: path | path; a pad name or v marks a point on that pad's centre or on a via)
1-1  (via drill 0.5)
  Top 0.406: SHIFT1.11 v142.26,15.32 | JP3.1 126.35,13.16 126.41,13.1 131.71,13.1 RN1.2
  Bottom 0.406: v142.26,15.32 134.19,15.32 131.99,13.15 RN1.2
1-2  (via drill 0.5)
  Top 0.406: SHIFT1.12 v143.53,14.57 | JP3.3 RN1.3
  Bottom 0.406: v143.53,14.57 143.53,15.78 143.01,16.3 133.81,16.3 133.21,15.7 RN1.3
1-3  (via drill 0.5)
  Top 0.406: SHIFT1.13 v144.81,15.3 | JP3.5 RN1.4
  Bottom 0.406: v144.81,15.3 144.81,15.8 143.51,17.1 133.81,17.1 132.68,18.23 RN1.4
1-4  (via drill 0.5)
  Top 0.406: SHIFT1.14 v146.07,14.56 | JP3.7 RN1.5
  Bottom 0.406: v146.07,14.56 146.07,15.83 144.01,17.9 134.91,17.9 132.04,20.77 RN1.5
1-5  (via drill 0.5)
  Top 0.406: SHIFT1.3 v146.07,24.96 | JP3.9 RN1.6
  Bottom 0.406: v146.07,24.96 146.07,23.77 144.71,22.4 133.81,22.4 132.9,23.31 RN1.6
1-6  (via drill 0.5)
  Top 0.406: SHIFT1.4 v144.81,25.79 | JP3.11 RN1.7
  Bottom 0.406: v144.81,25.79 144.81,23.7 144.31,23.2 134.31,23.2 134.01,23.5 134.01,25.6 133.76,25.85 RN1.7 132.06,25.85
1-7  (via drill 0.5)
  Top 0.406: SHIFT1.5 v143.53,24.82 | JP3.13 RN1.8
  Bottom 0.406: v143.53,24.82 142.71,24 134.91,24 134.71,24.2 134.71,27.1 133.41,28.4 RN1.8 131.92,28.39
1-8  (via drill 0.5)
  Top 0.406: SHIFT1.6 v142.26,25.79 | JP3.15 RN1.9
  Bottom 0.406: v142.26,25.79 142.26,25.16 141.91,24.8 135.81,24.8 135.51,25.1 135.41,29 133.48,30.93 RN1.9 131.98,30.93
1-9  (via drill 0.5)